# Altium PCB miaow_foc_board.PcbDoc (part 1 of 2)
Units mil, origin at the board's own origin, x right, y up, seen from the top; angles counter-clockwise.
Board outline 3070.7 x 3057.58 mil, 6 copper layers (SIG01, GND02, SIG03, PWR04, GND05, SIG06), stack 60.567 mil thick; 396 components, 384 nets, 1886 pads, 189 vias.
Unrouted connection lines stored in the file: 864.
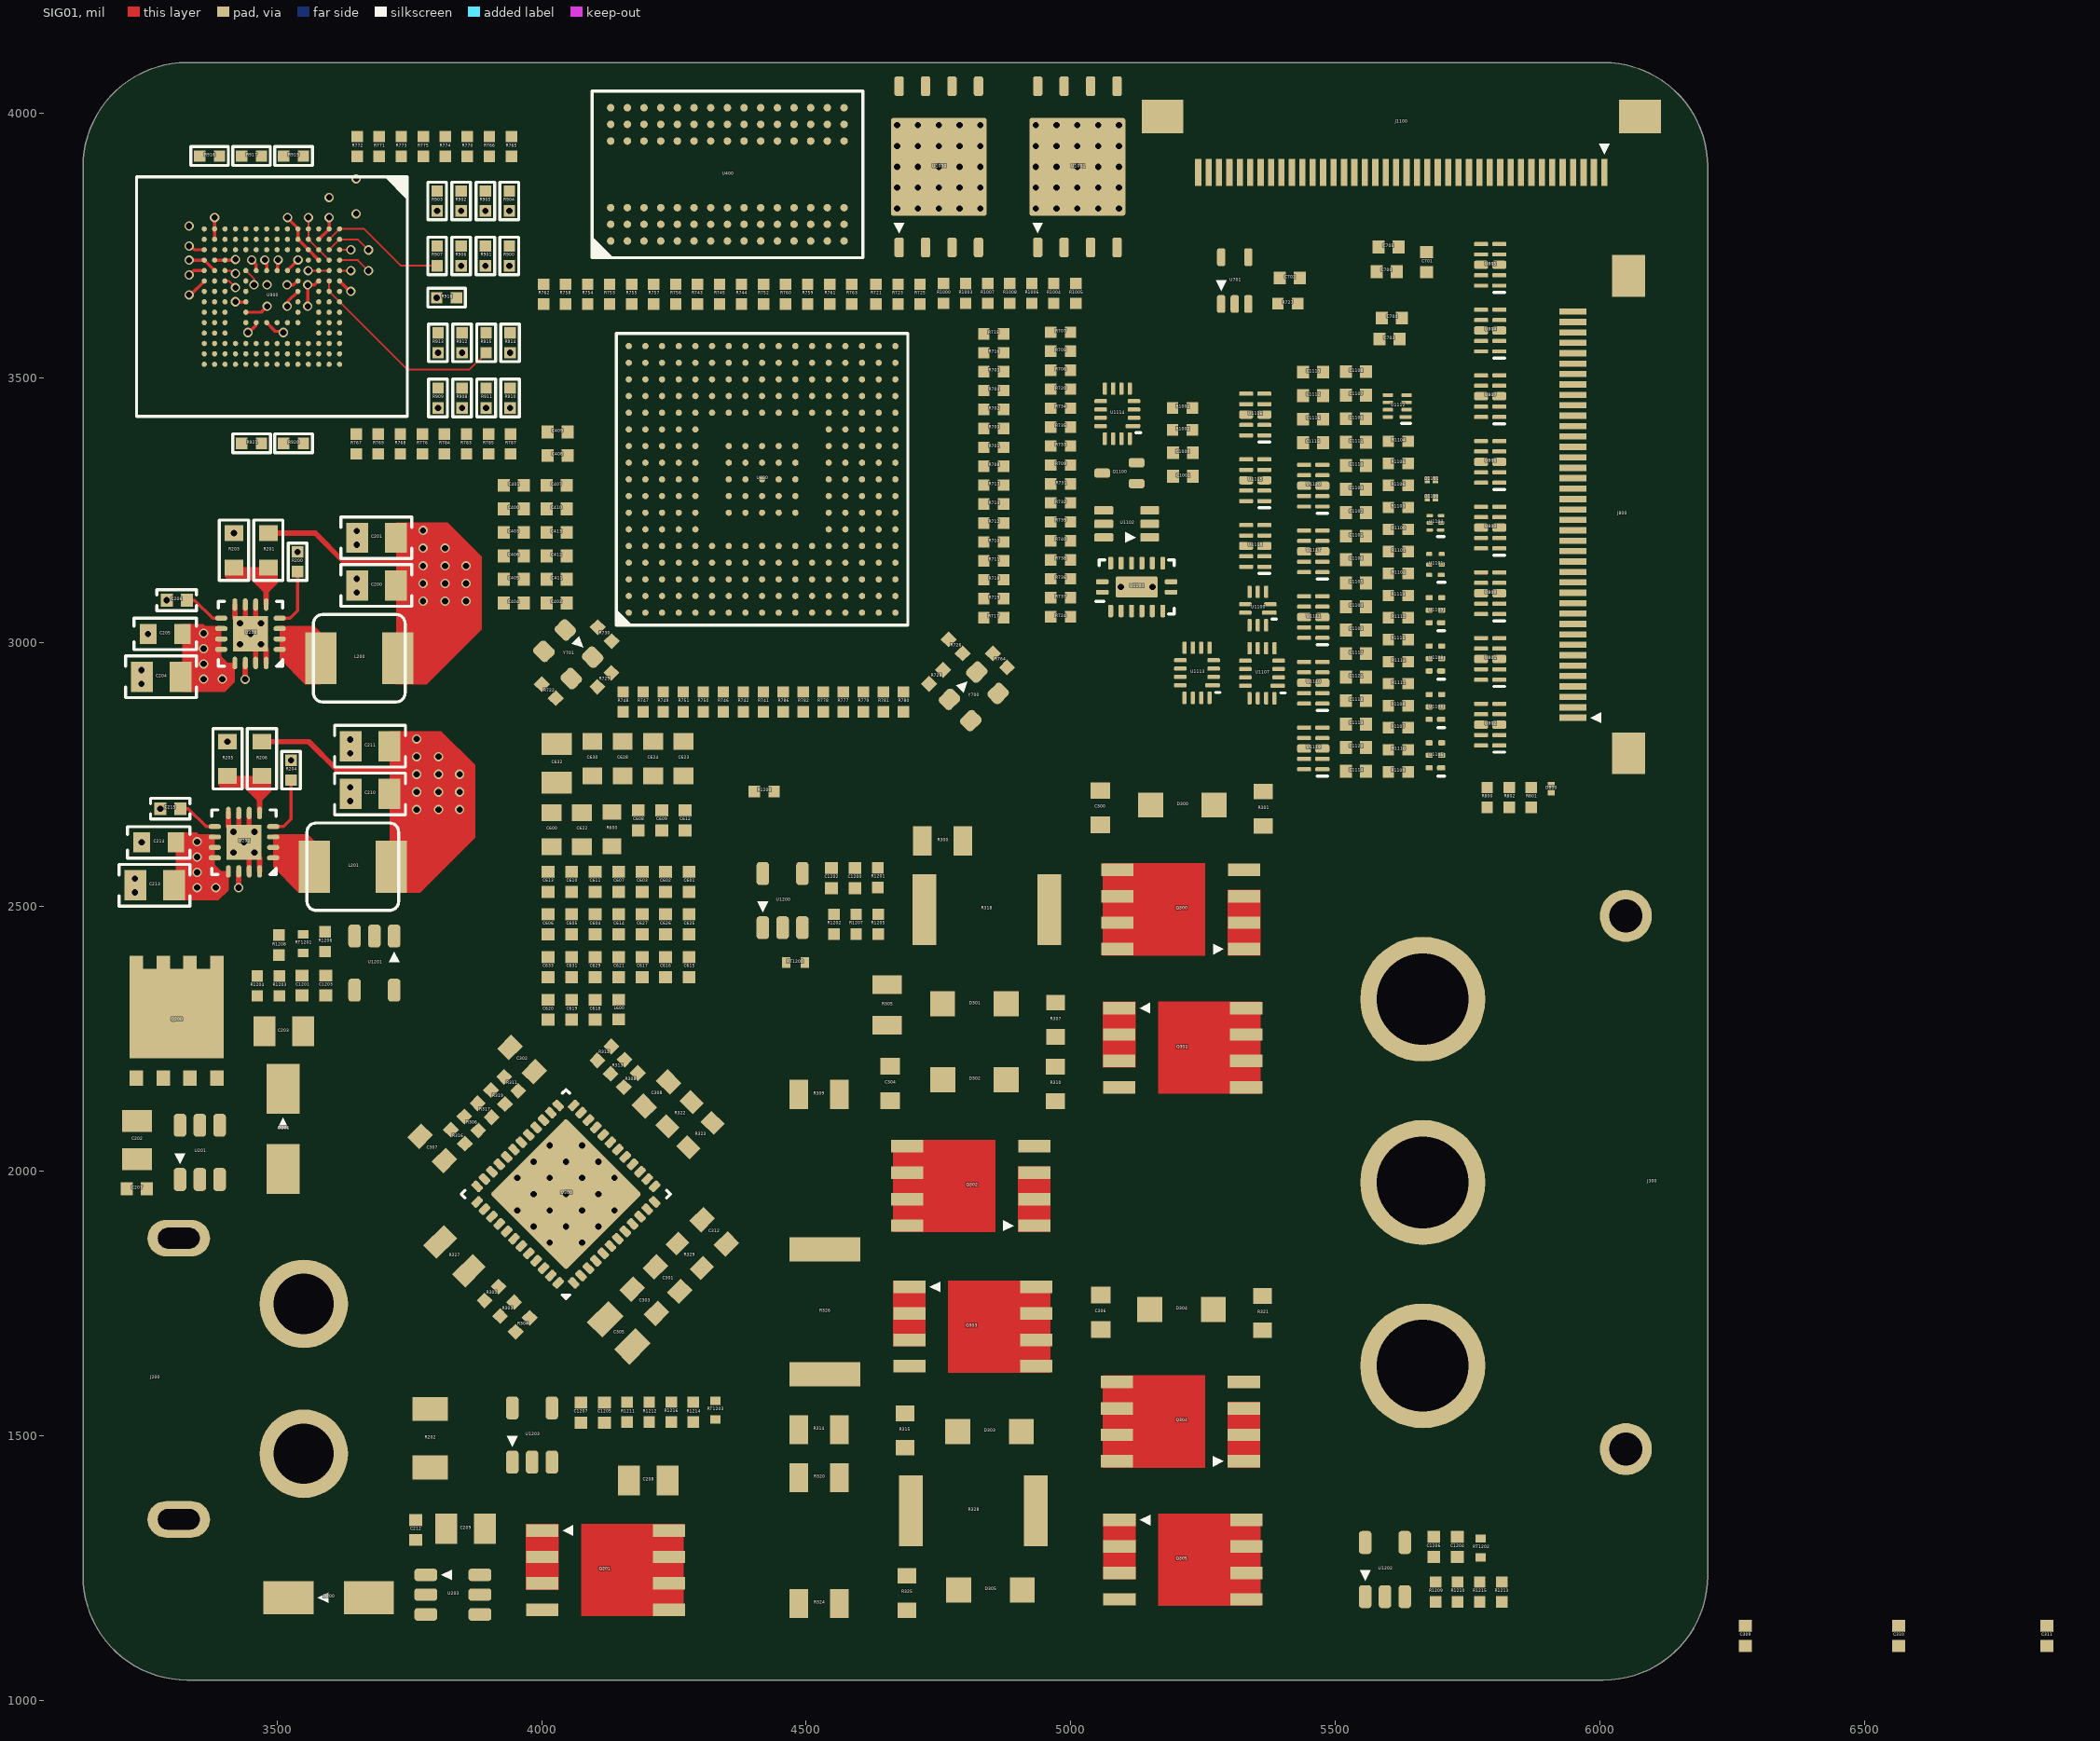
[diagram p0: SIG01 view]
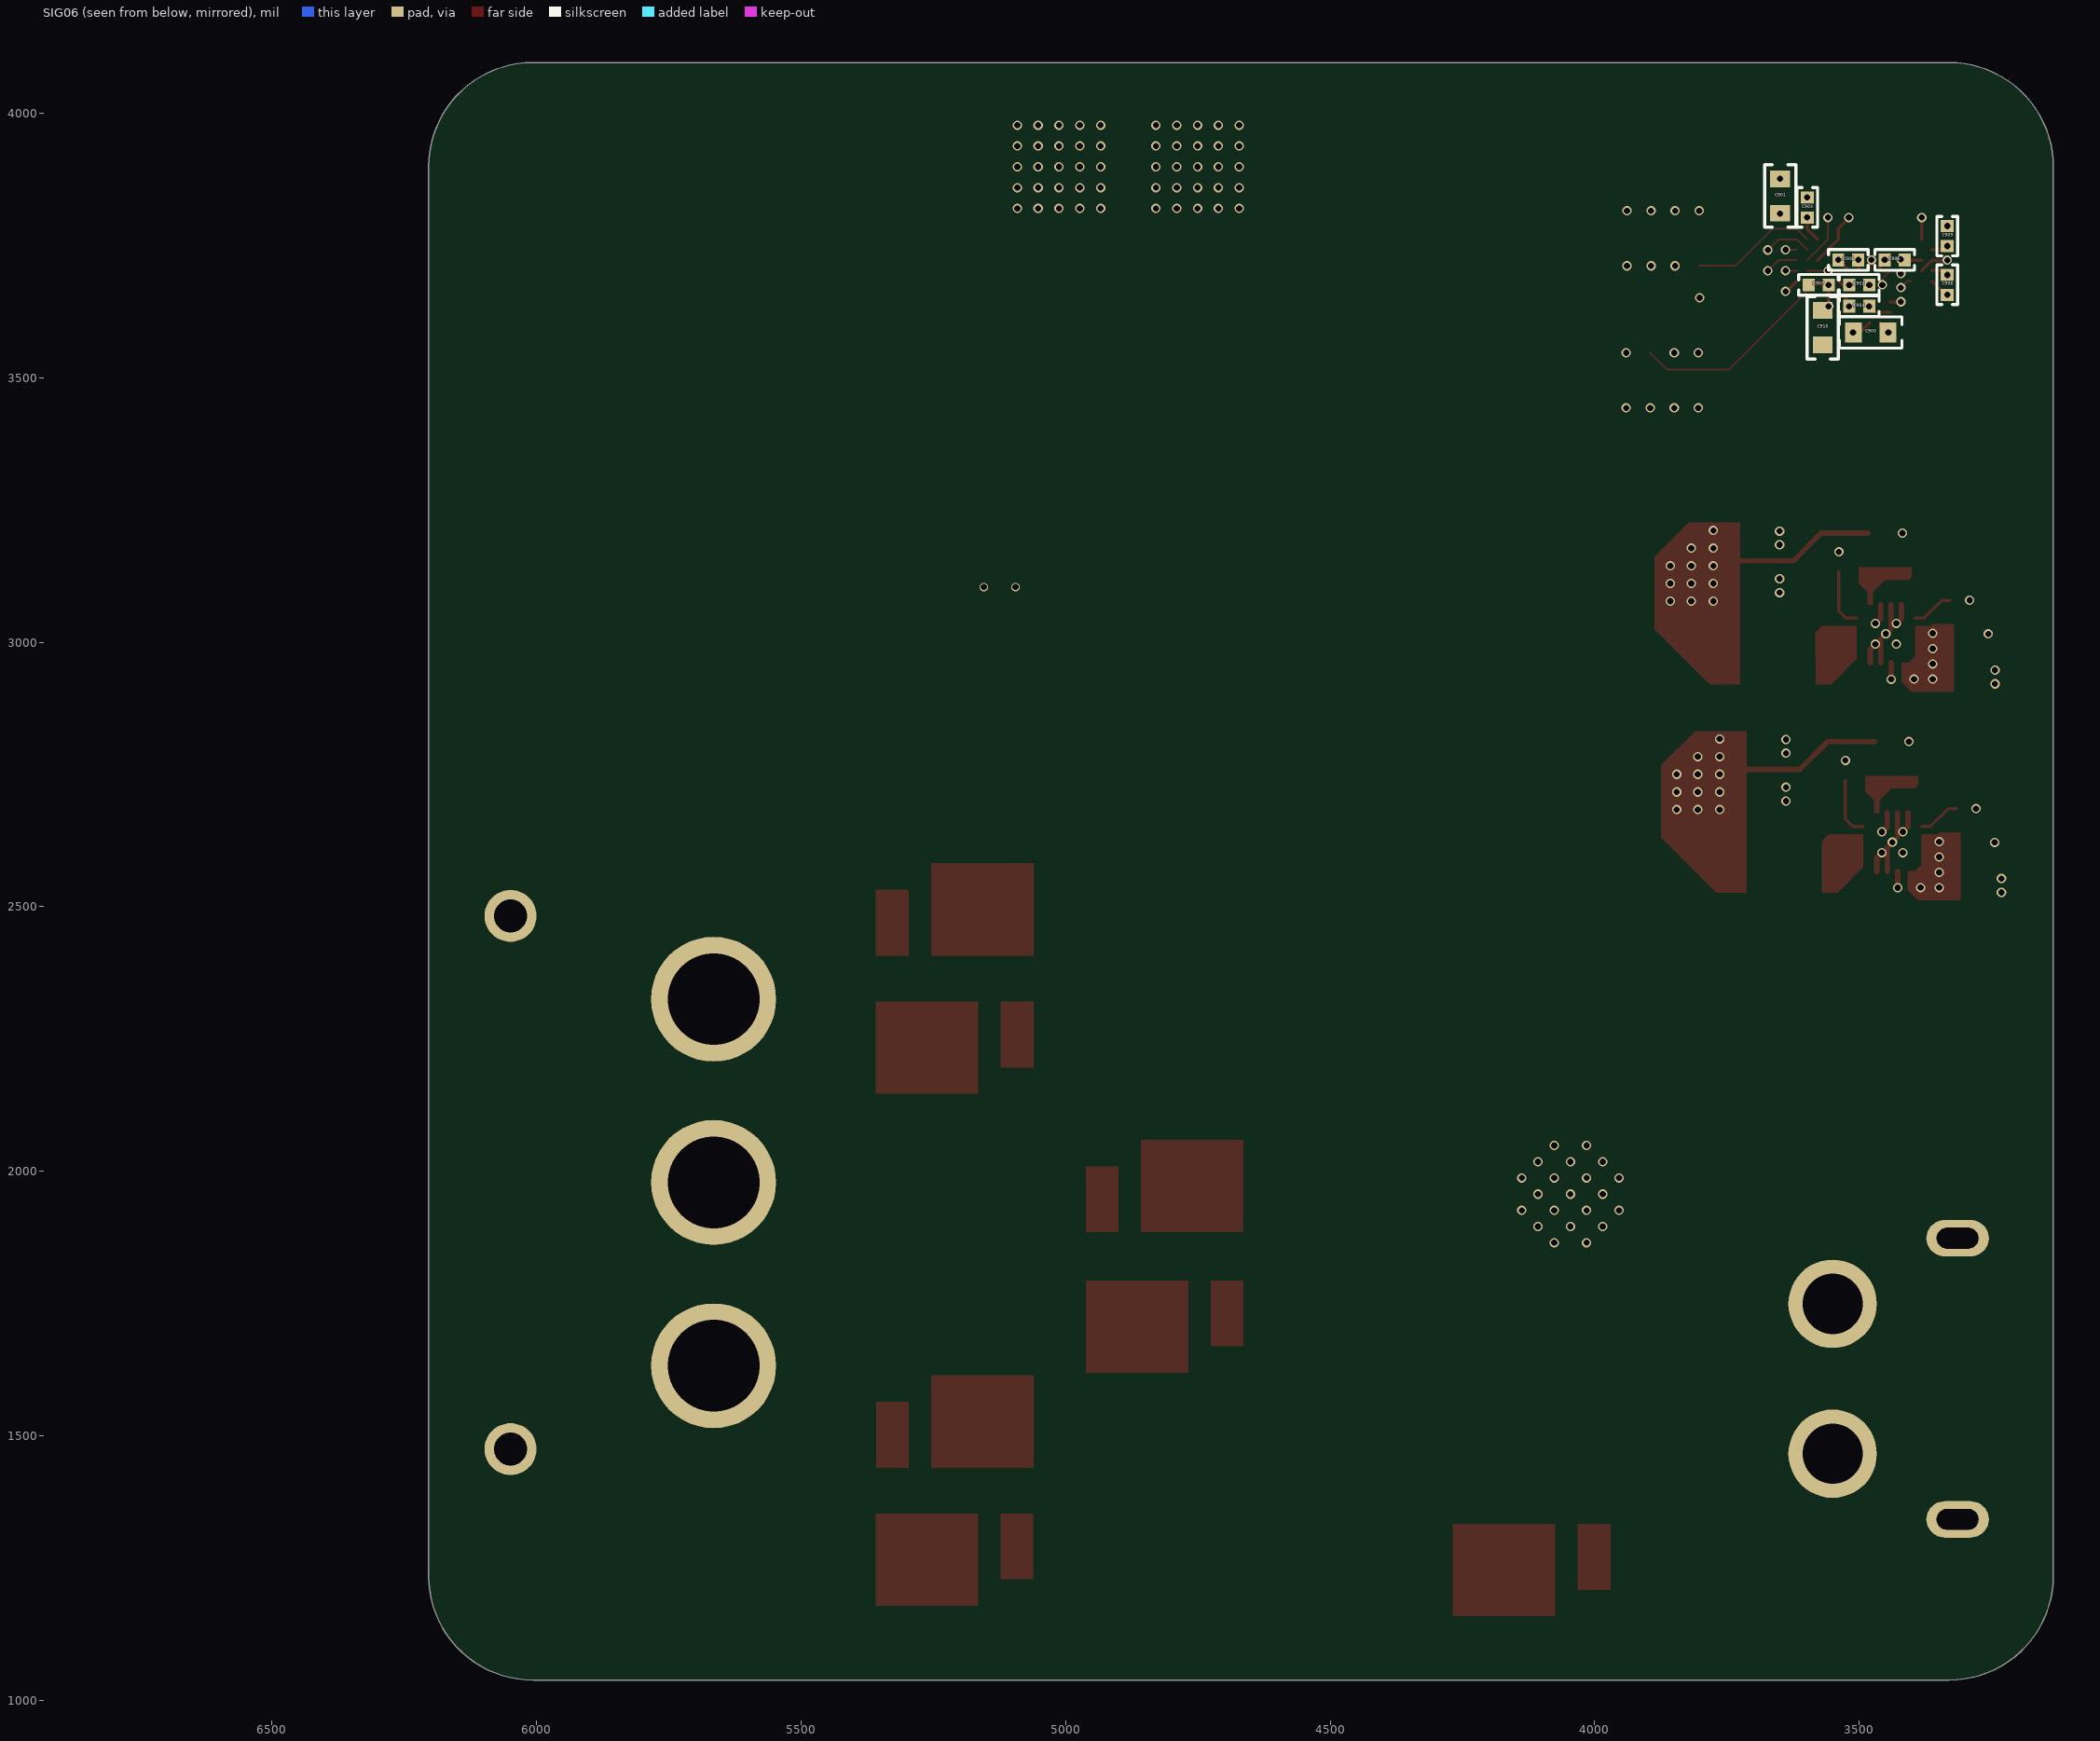
[diagram p1: SIG06 view, seen from below]
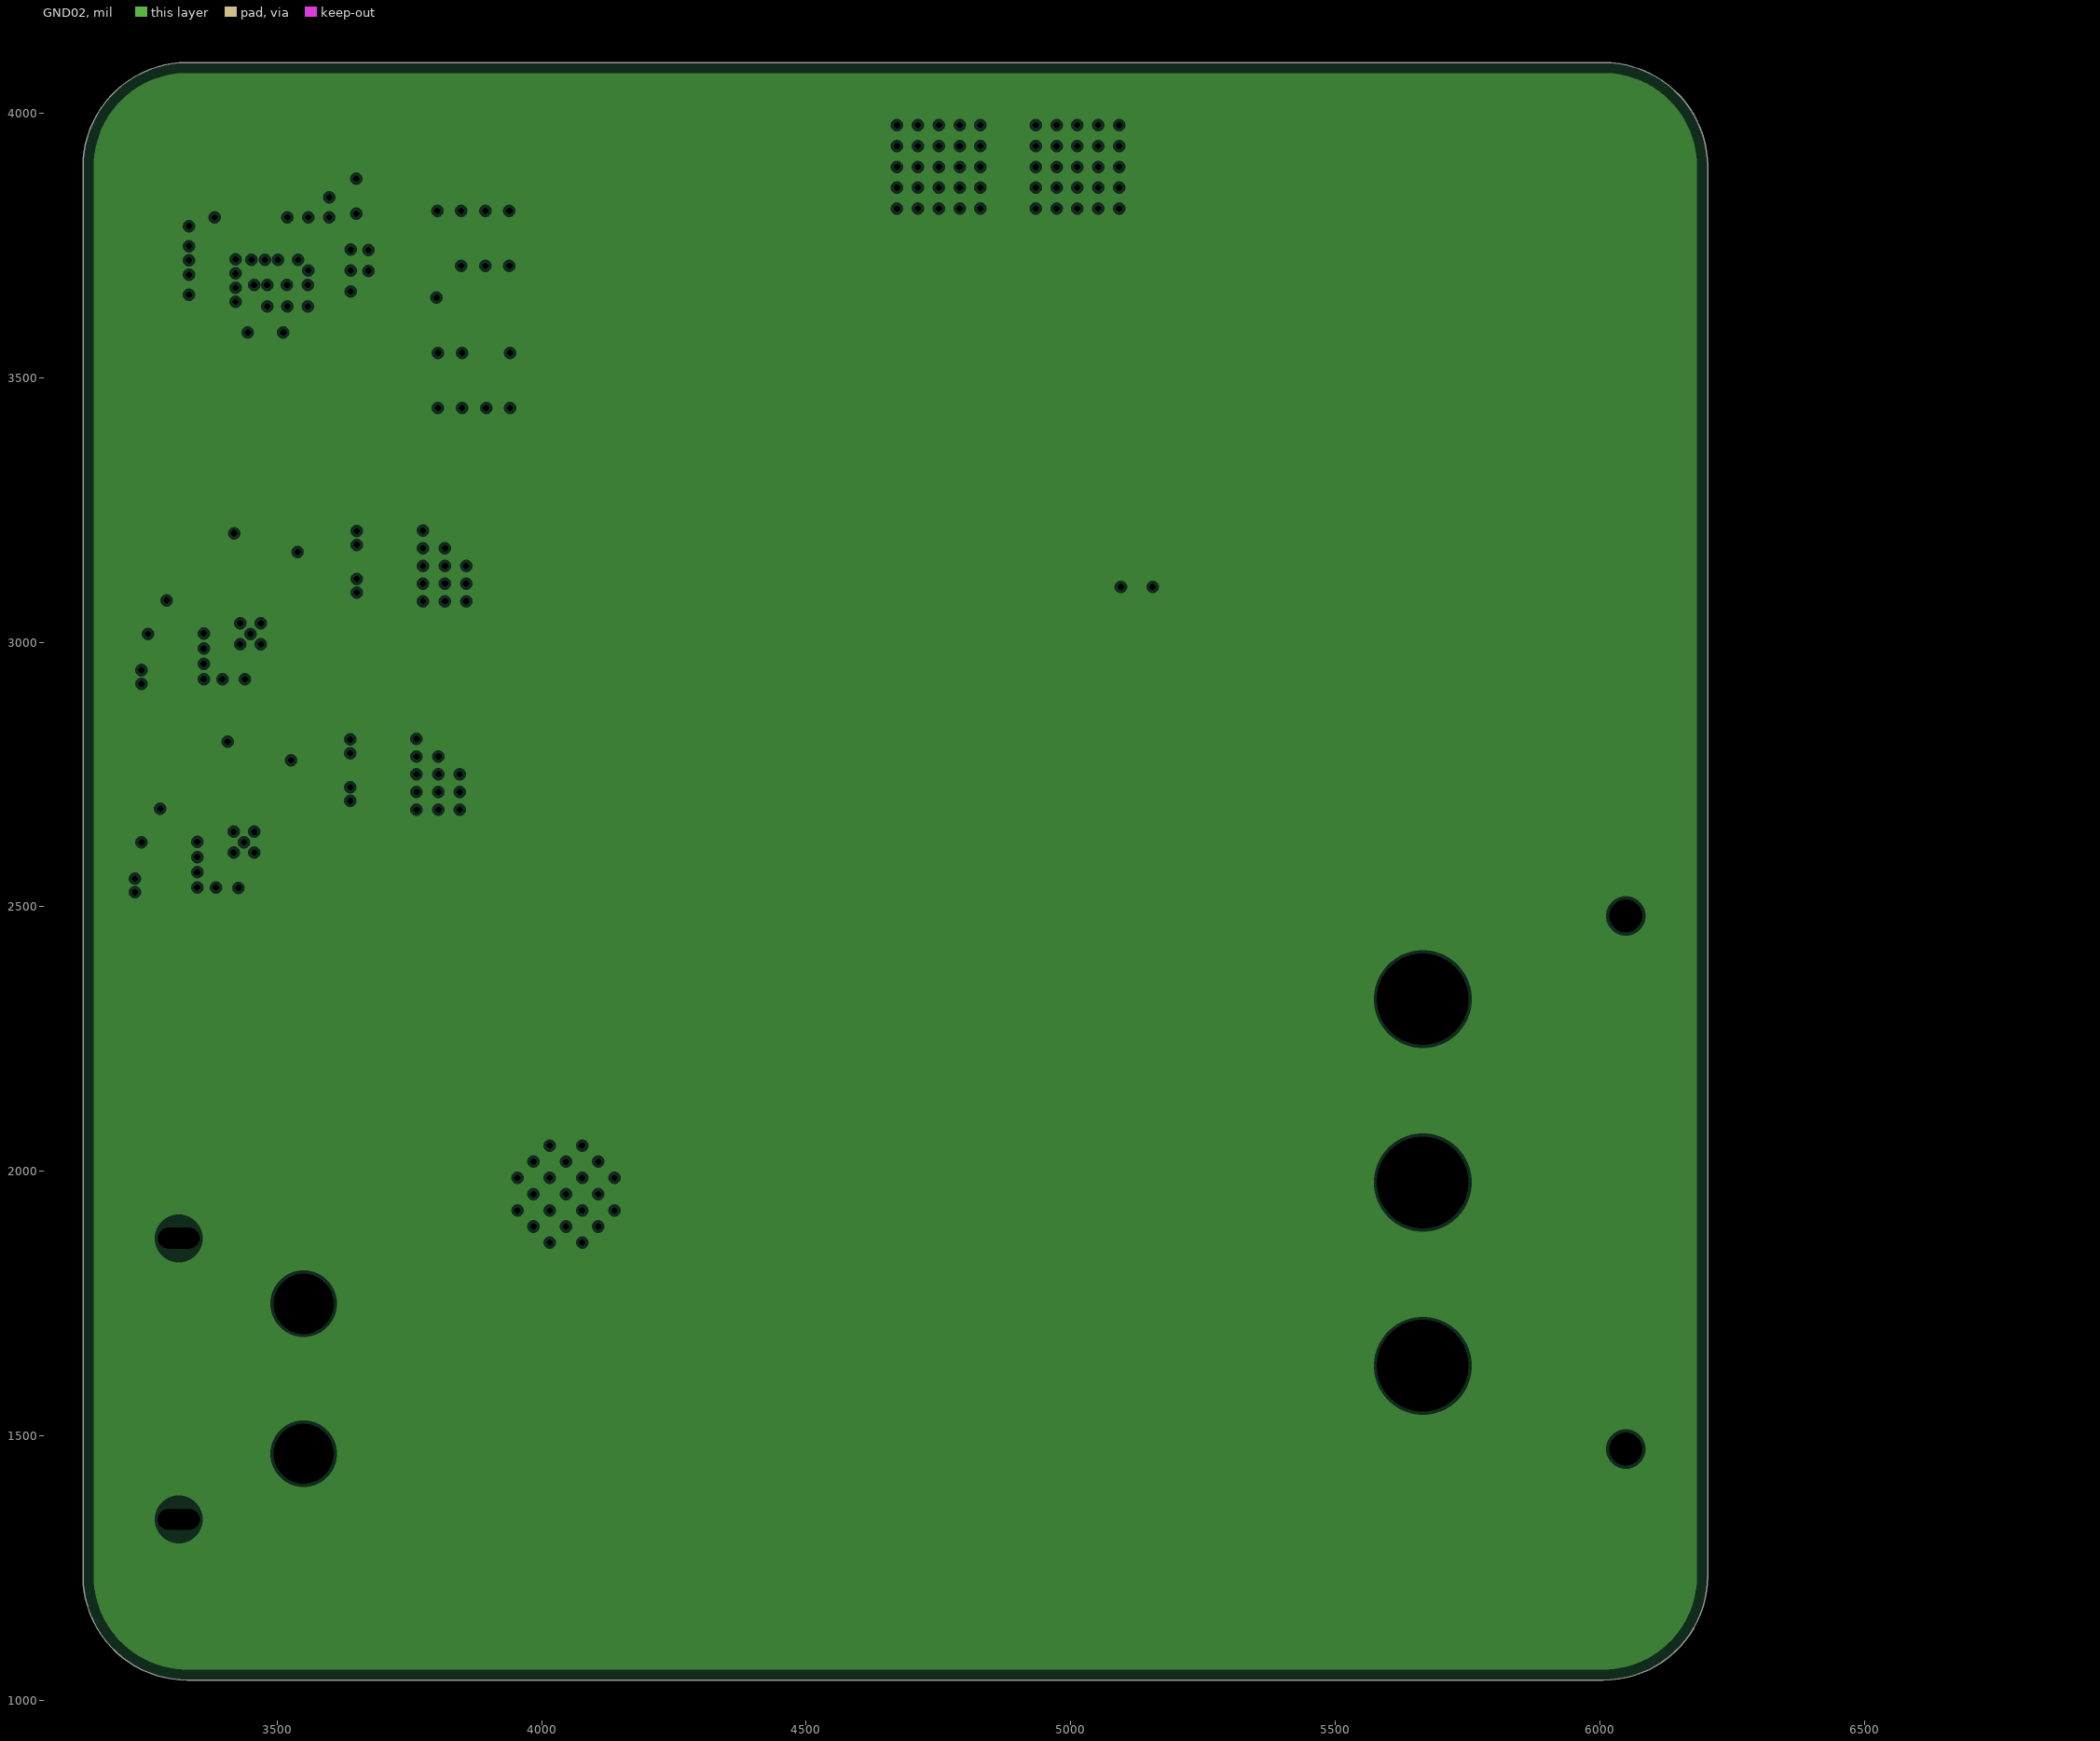
[diagram p2: GND02, clearances drawn from the general rule]
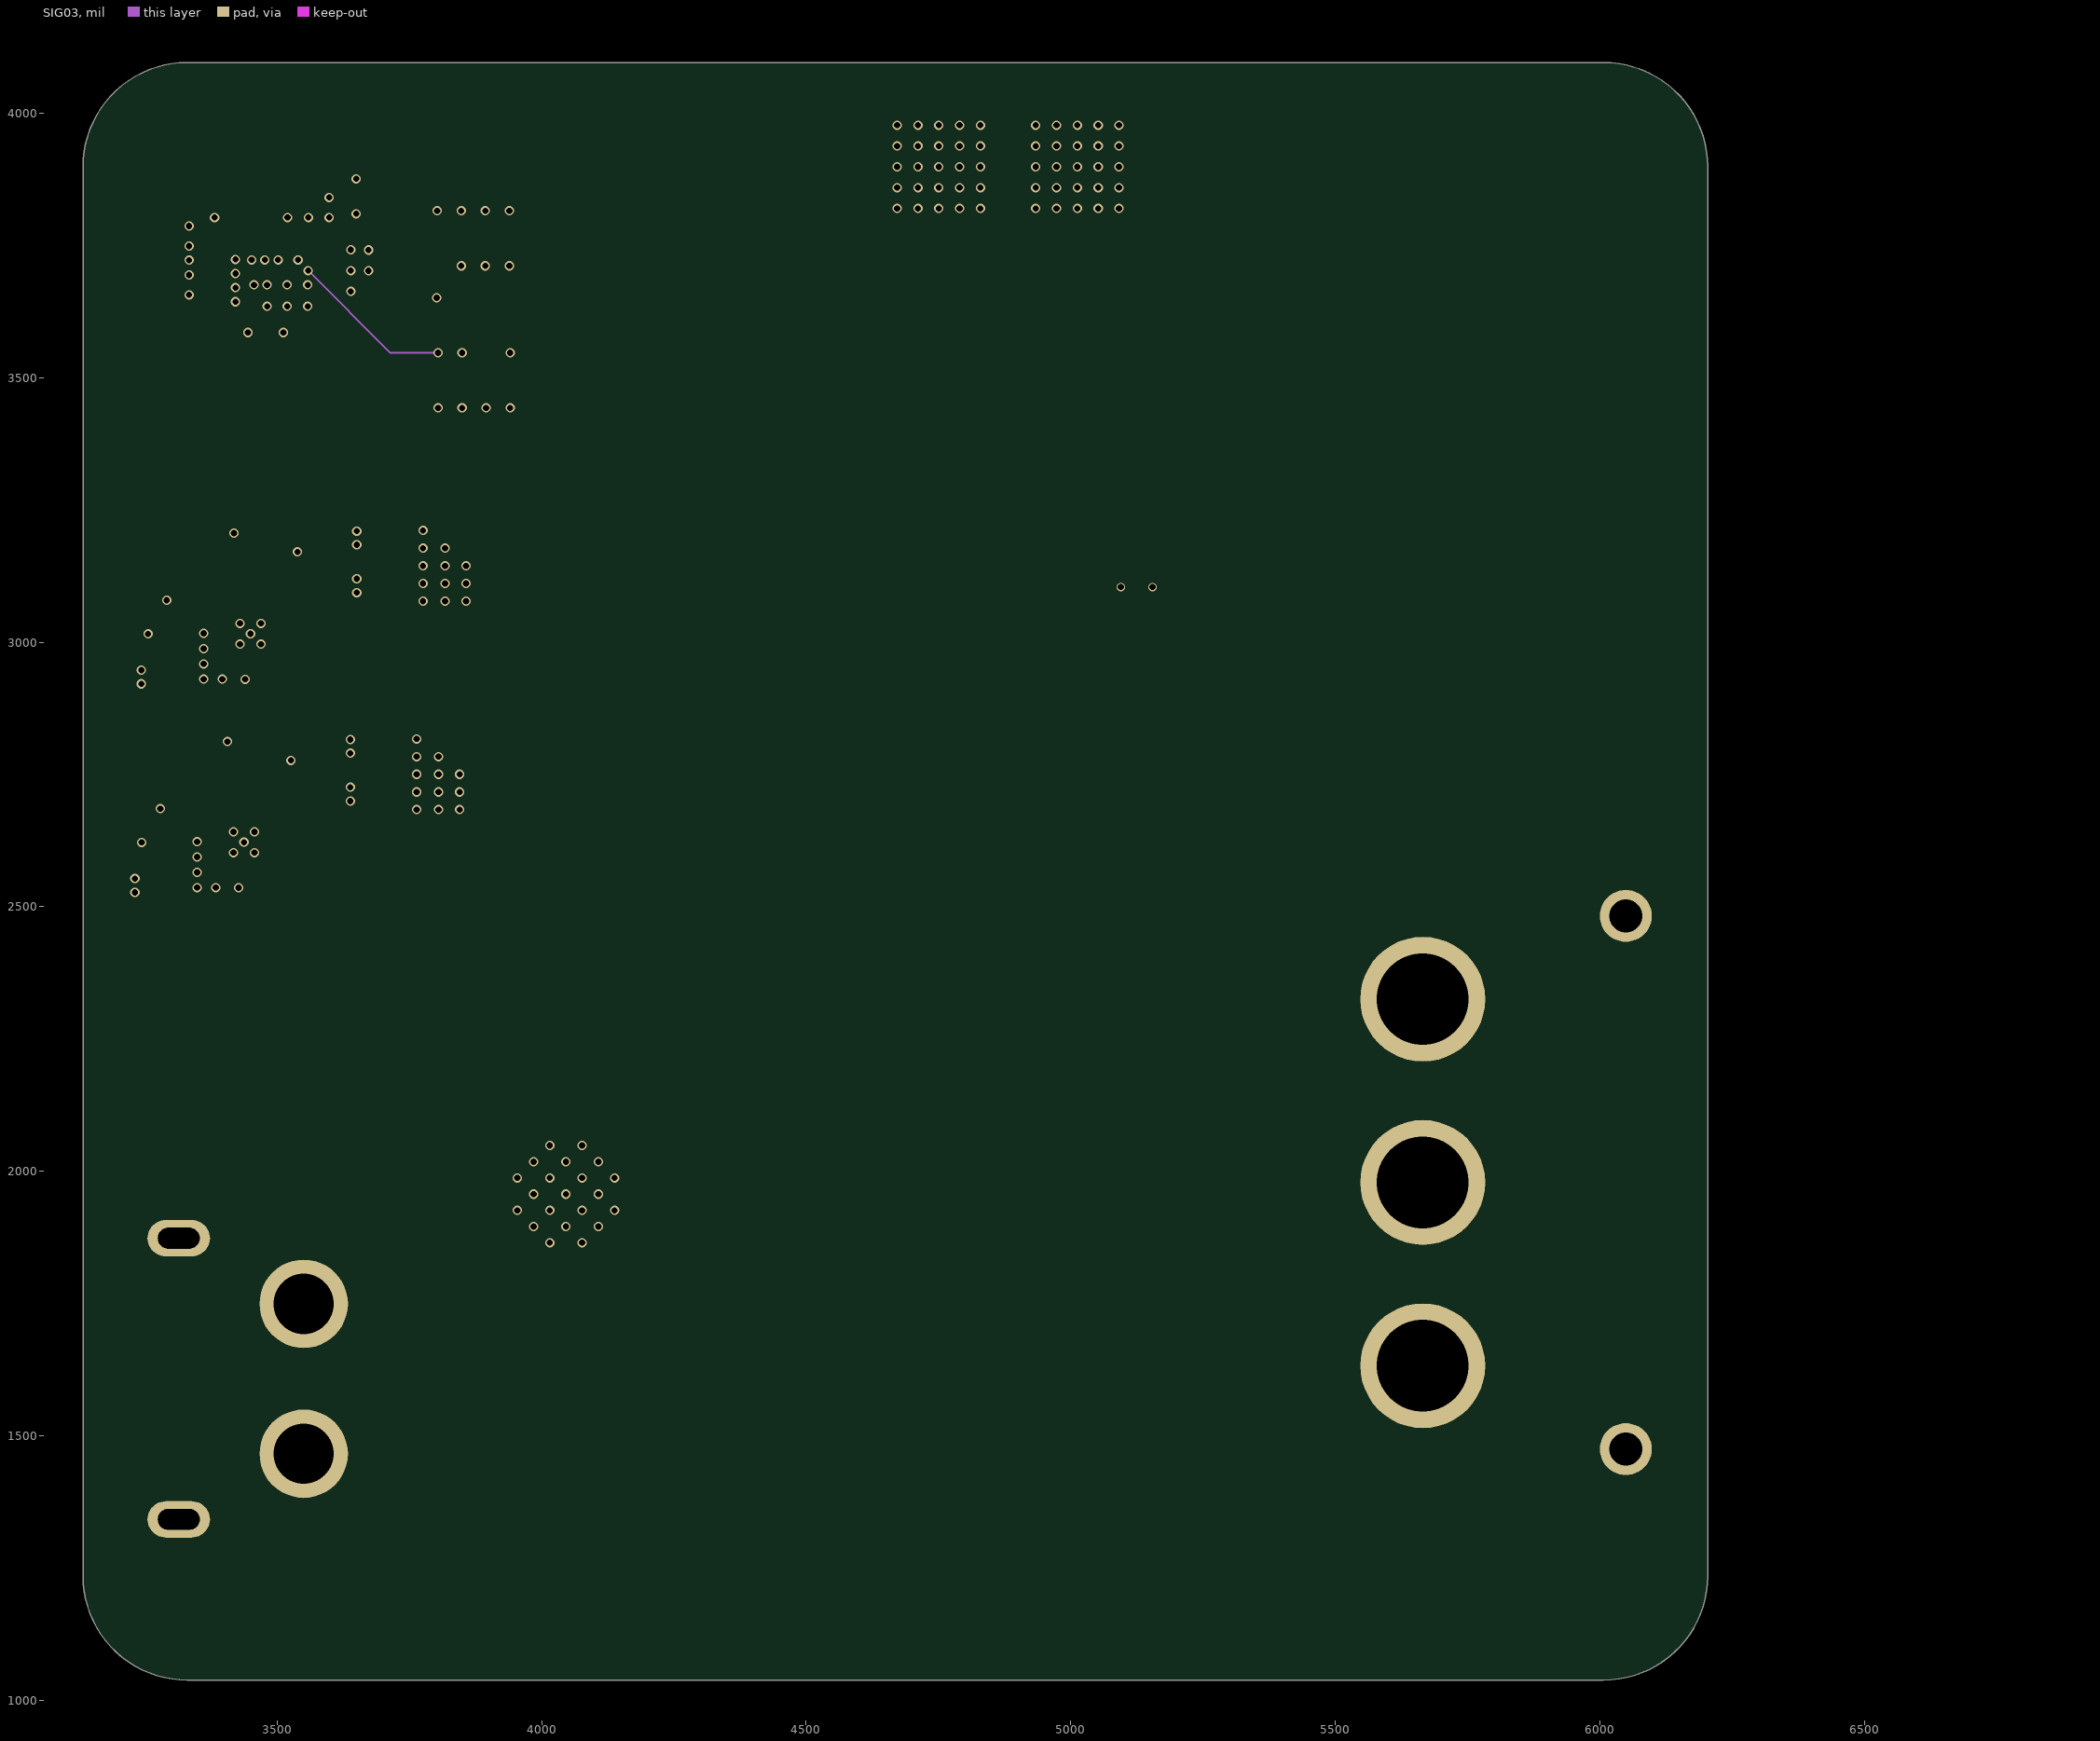
[diagram p3: SIG03]
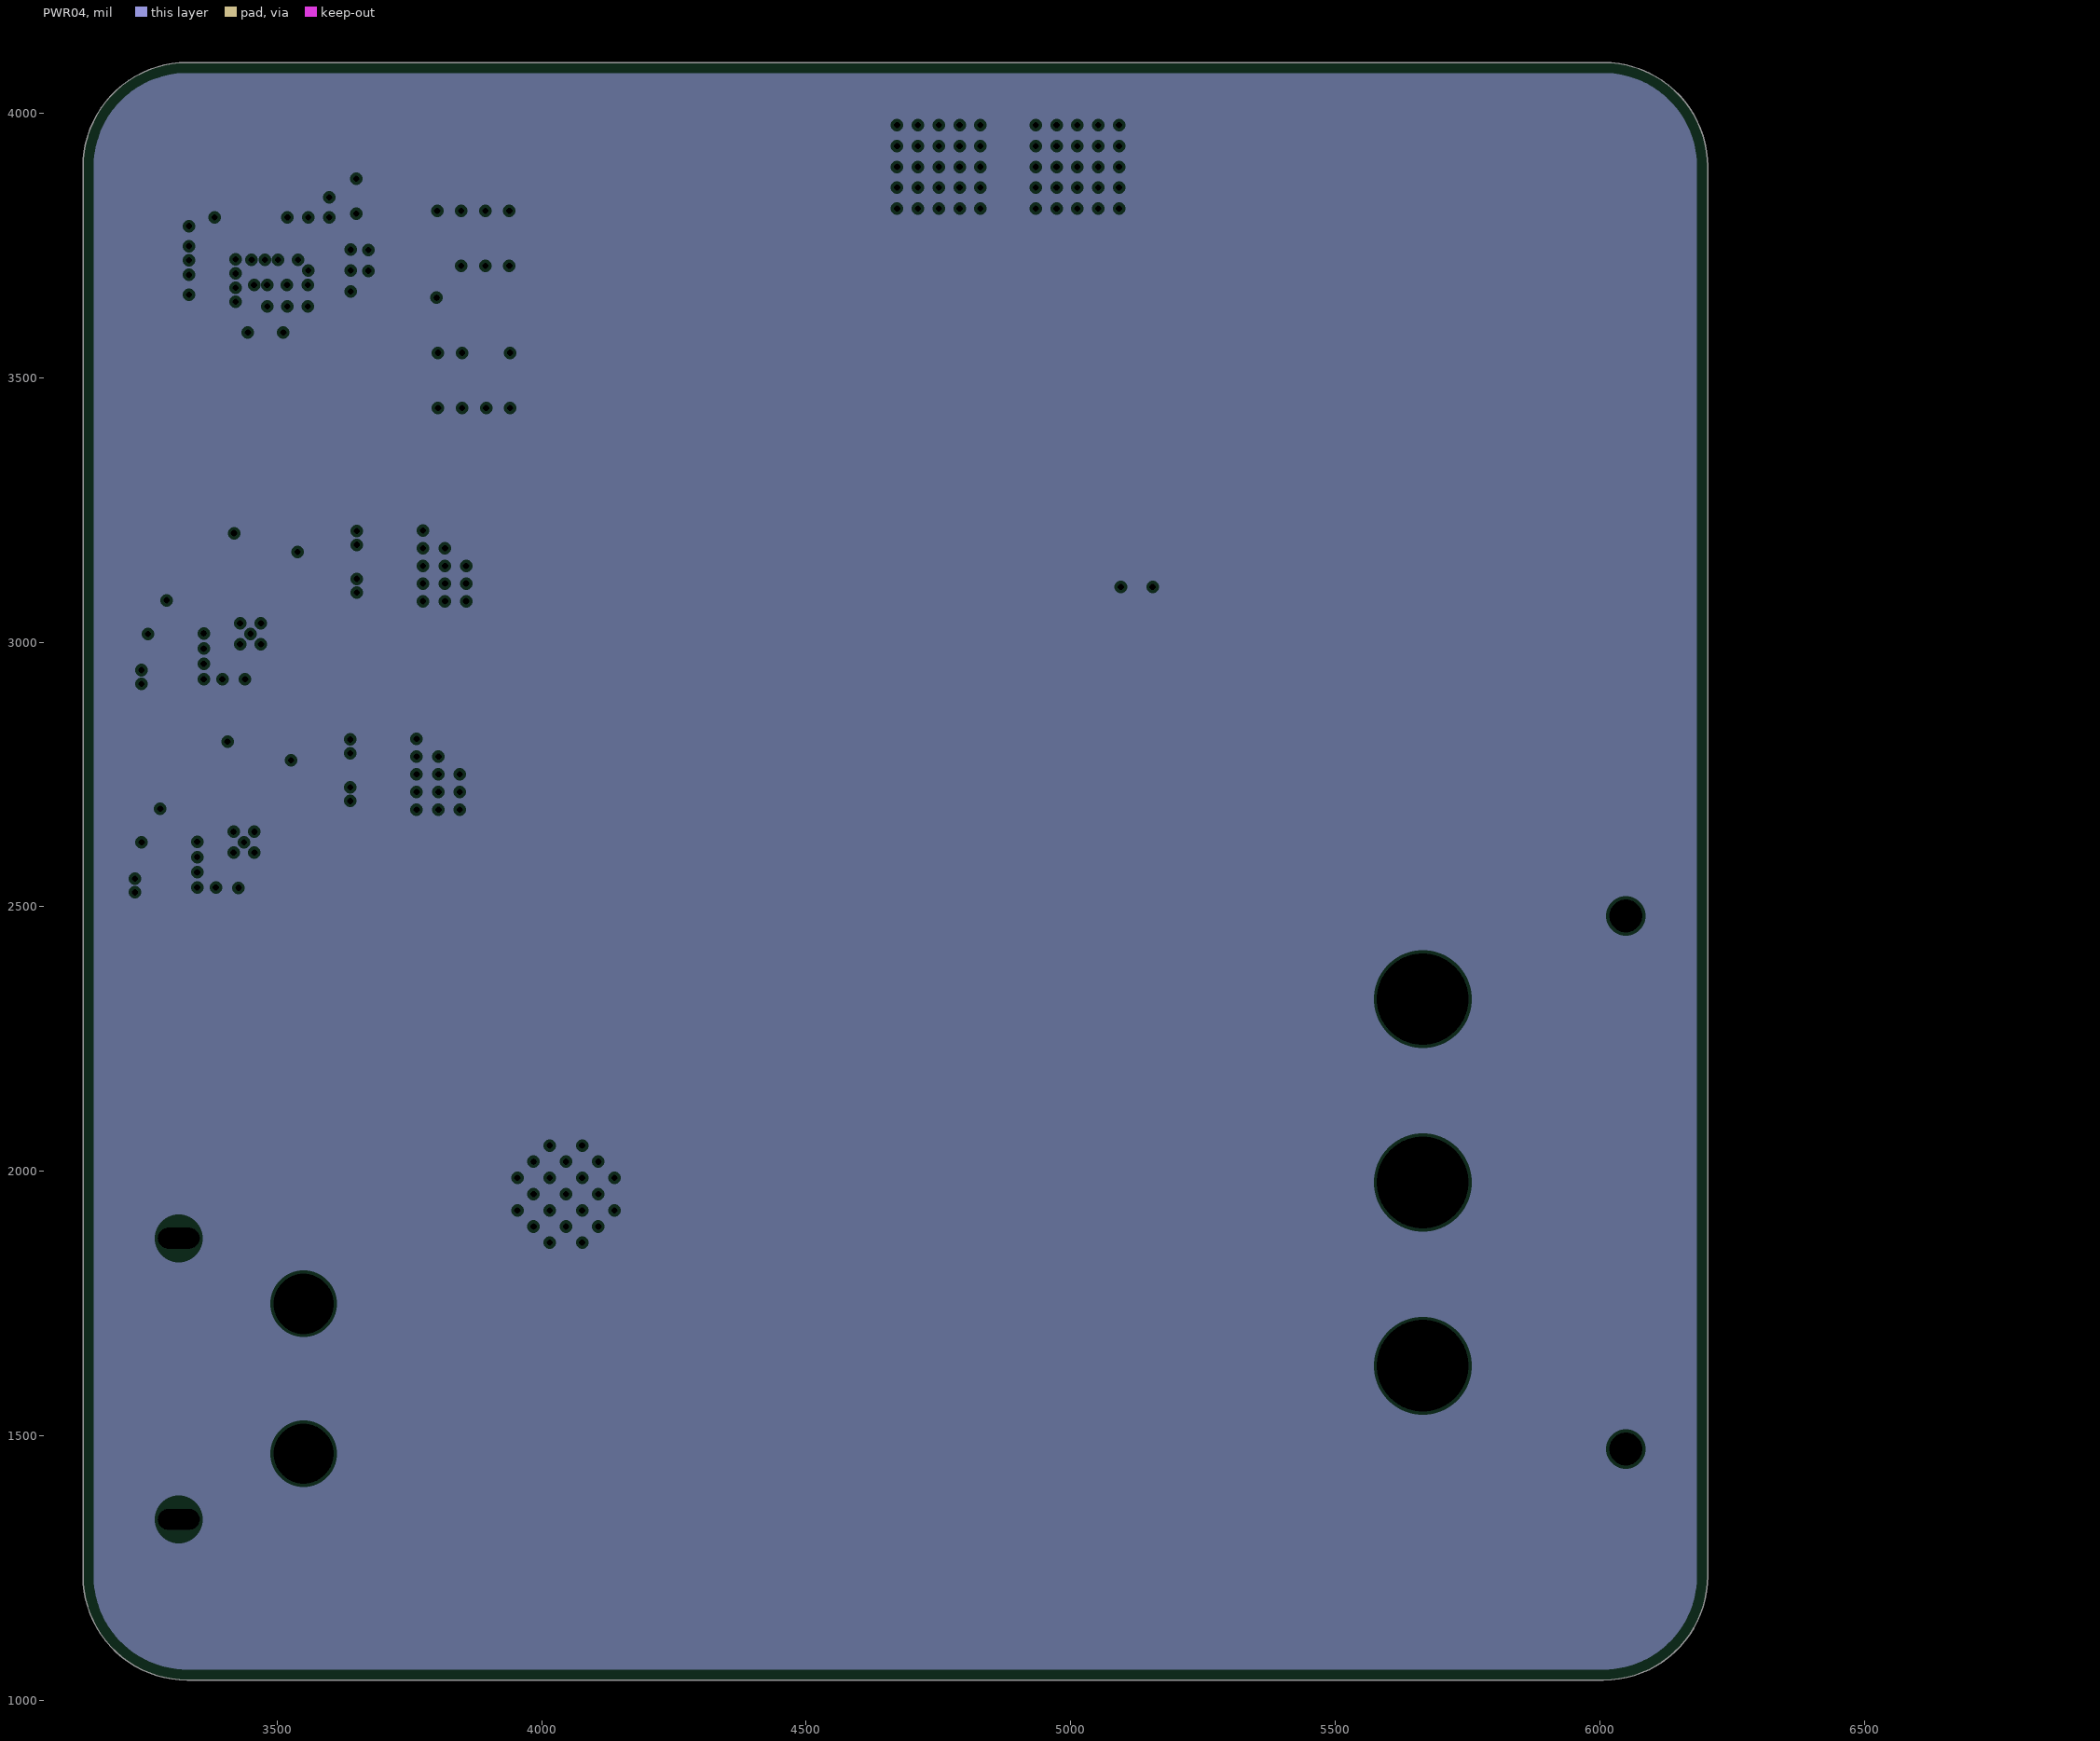
[diagram p4: PWR04, clearances drawn from the general rule]
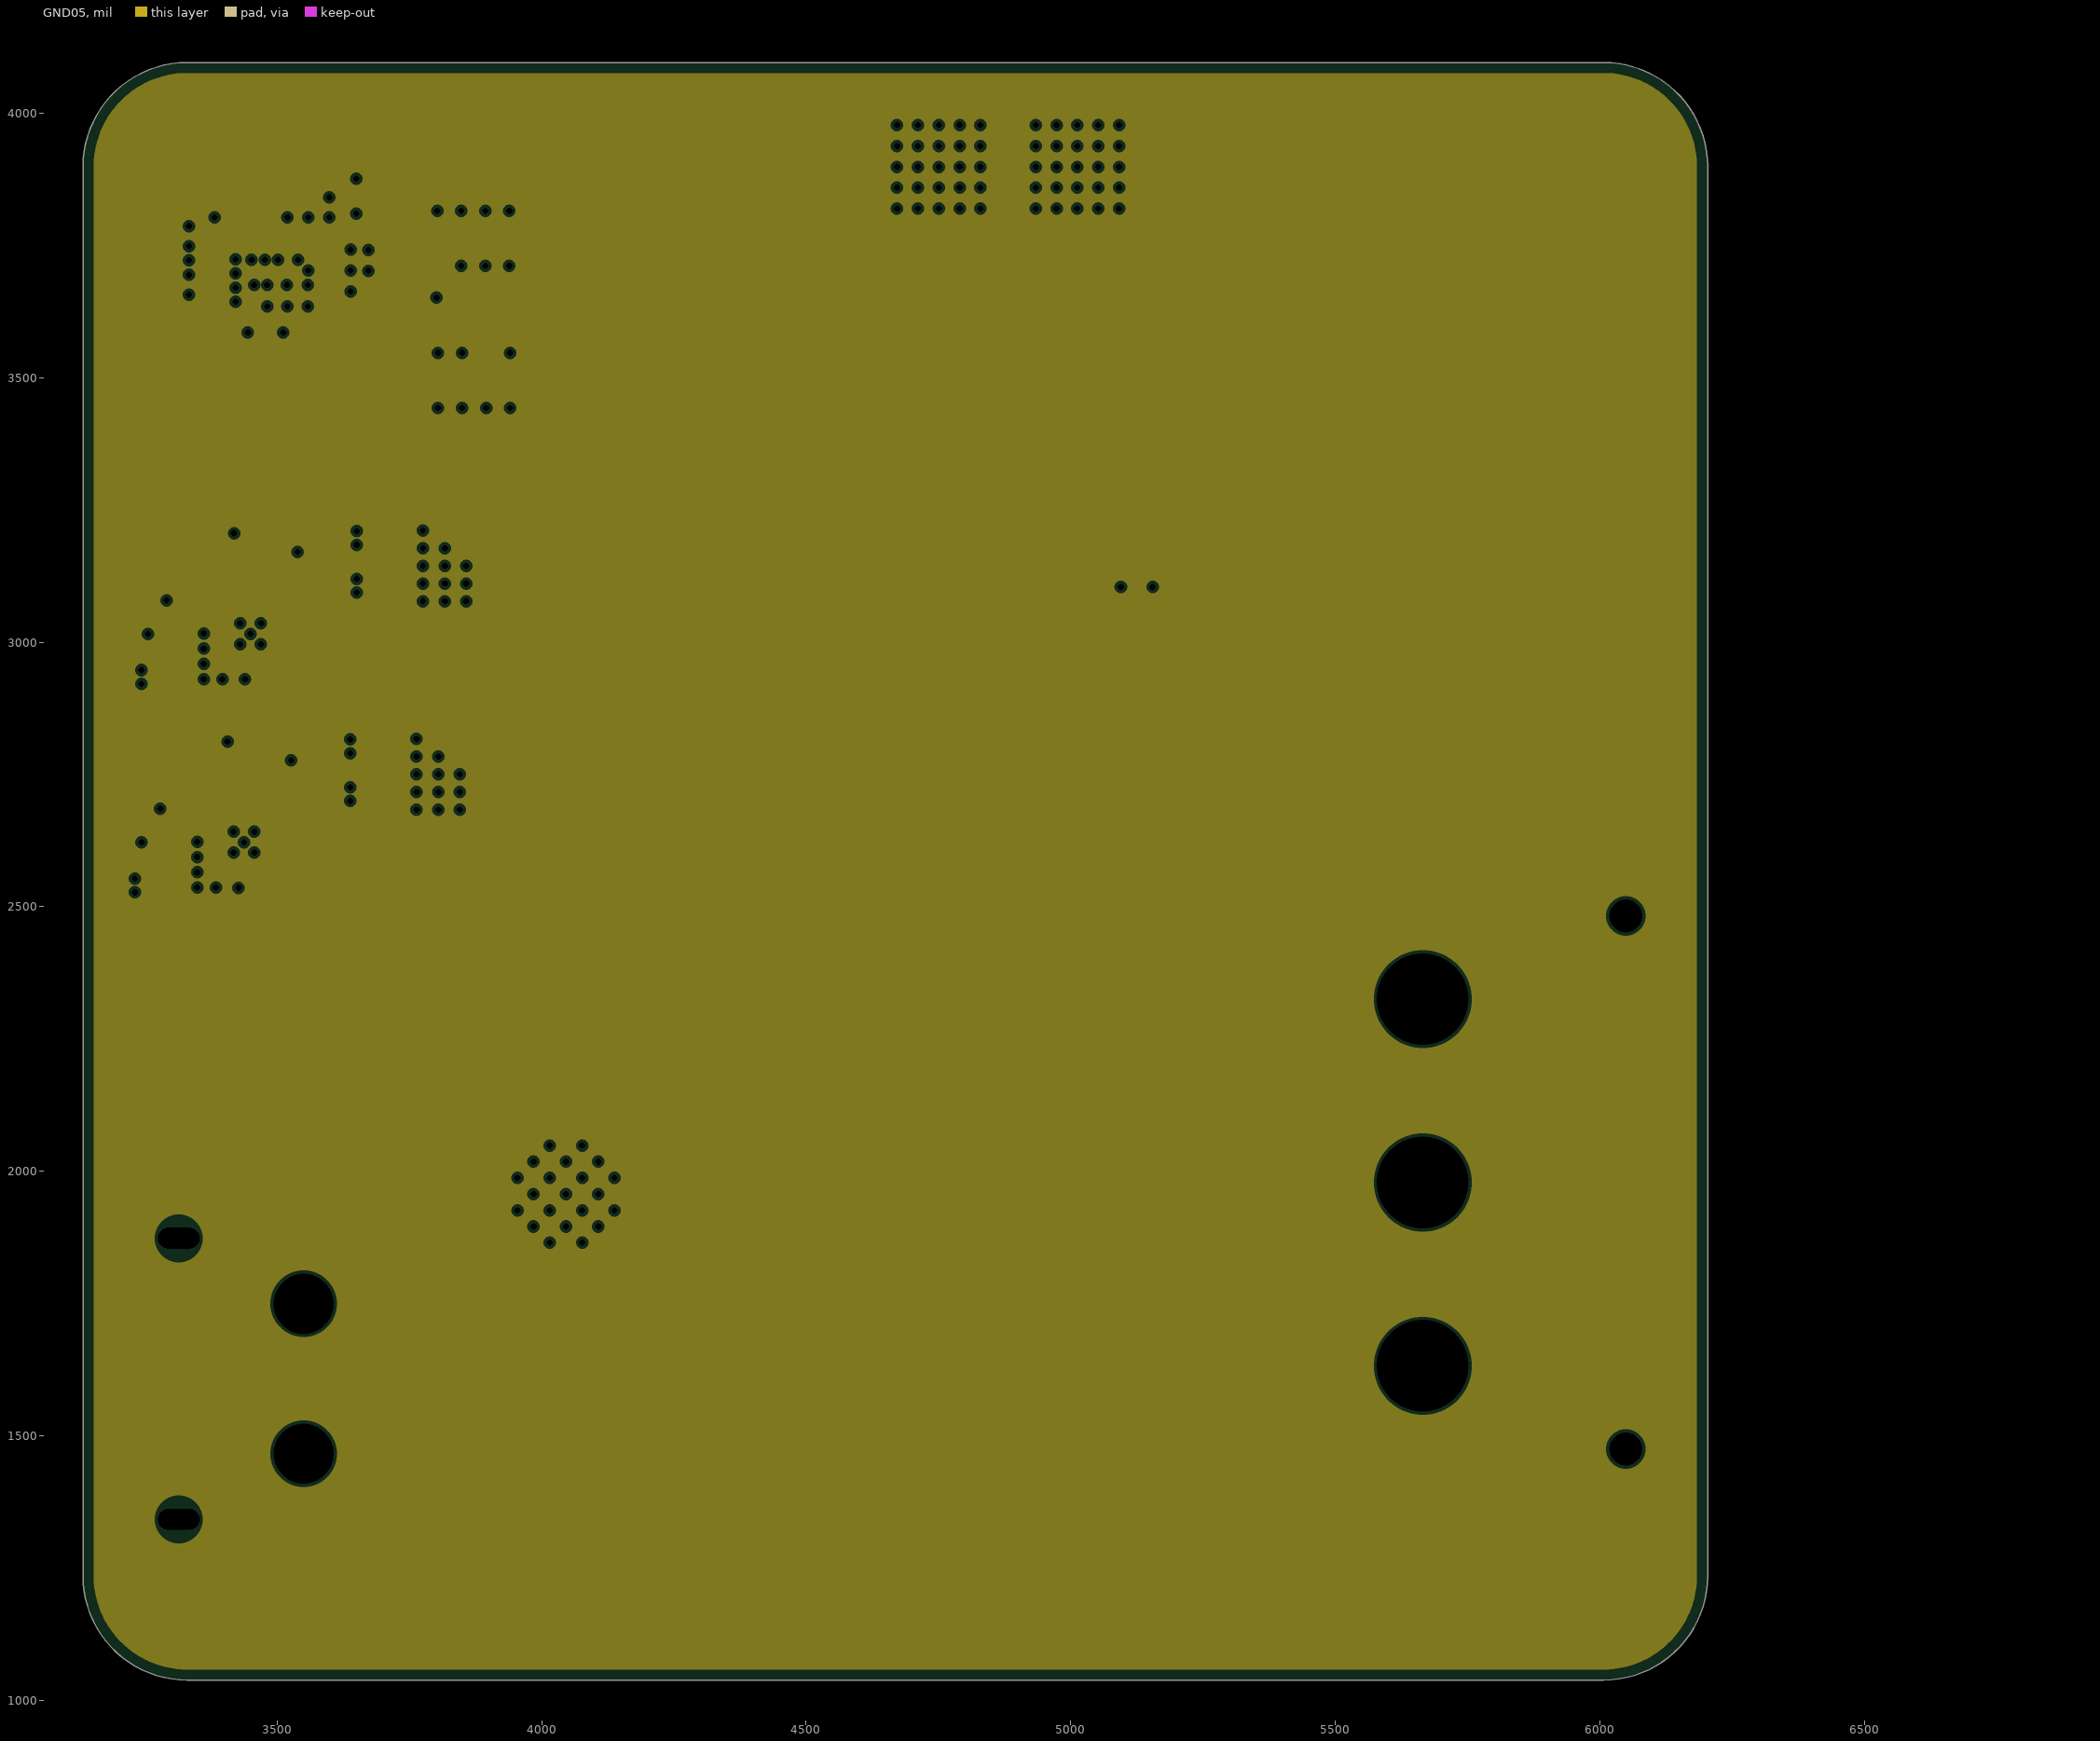
[diagram p5: GND05, clearances drawn from the general rule]

## Layer stack, top to bottom
Top Solder: solder mask 0.4, Solder Resist, Dk 3.5
SIG01: signal copper 1.378
Dielectric 2: prepreg 3.9134, PP-015, Dk 4.3
GND02: plane copper 0.5984
Dielectric 4: core 21.6535, Core-037, Dk 4.8
SIG03: signal copper 0.5984
Dielectric 1: prepreg 4.2835, PP-016, Dk 4.4
PWR04: plane copper 0.5984
Dielectric 5: core 21.6535, Core-037, Dk 4.8
GND05: plane copper 0.5984
Dielectric 3: prepreg 3.9134, PP-015, Dk 4.3
SIG06: signal copper 1.378
Bottom Solder: solder mask 0.4, Solder Resist, Dk 3.5

## Board outline
3133.15,1235.11 3133.15,3898.99 cw(c3330,3898.99) 3330,4095.84 6007,4095.84 cw(c6007,3898.99) 6203.85,3898.99 6203.85,1235.11 cw(c6007,1235.11) 6007,1038.26 3330,1038.26 cw(c3330,1235.11)

## Design rules (kind name [scope] priority, off if disabled: settings)
BoardOutlineClearance [All] p1: gap=7.87 ignorepadtopadclearanceinfootprint=FALSE
Clearance Clearance_BGA [WithinRoom('BGA') vs WithinRoom('BGA')] p1: gap=3 ignorepadtopadclearanceinfootprint=FALSE except(3.54: Arc-SMDPad Arc-Via Track-SMDPad Track-Via SMDPad-SMDPad SMDPad-THPad SMDPad-Via SMDPad-Fill SMDPad-Poly SMDPad-Region SMDPad-Text SMDPad-Hole THPad-Via Via-Via Via-Fill Via-Poly Via-Region Via-Text Via-Hole)
Clearance [All] p2: gap=3.5 ignorepadtopadclearanceinfootprint=FALSE except(3.94: Arc-SMDPad Arc-Via Track-SMDPad Track-Via SMDPad-SMDPad SMDPad-THPad SMDPad-Via SMDPad-Fill SMDPad-Poly SMDPad-Region SMDPad-Text SMDPad-Hole THPad-Via Via-Via Via-Fill Via-Poly Via-Region Via-Text Via-Hole)
FanoutControl Fanout_BGA [IsBGA or HasFootprint('IS42S32800J-6BLI')] p1: bgadir=Out bgaviamode=Centered fanoutstyle=BGA fanoutdirection=Alternating viagrid=1 // Fanout_BGA (Default Rule)
FanoutControl Fanout_LCC [IsLCC] p2: bgadir=Out bgaviamode=Centered fanoutstyle=UnderPads fanoutdirection=Alternating viagrid=1 // Fanout_LCC (Default Rule)
FanoutControl Fanout_SOIC [IsSOIC] p3: bgadir=Out bgaviamode=Centered fanoutstyle=UnderPads fanoutdirection=Alternating viagrid=1 // Fanout_SOIC (Default Rule)
FanoutControl Fanout_Small [(CompPinCount < 5)] p4: bgadir=Out bgaviamode=Centered fanoutstyle=UnderPads fanoutdirection=OutThenIn viagrid=1 // Fanout_Small (Default Rule)
FanoutControl Fanout_Default [All] p5: bgadir=Out bgaviamode=Centered fanoutstyle=UnderPads fanoutdirection=Alternating viagrid=1 // Fanout_Default (Default Rule)
HoleSize [All] p1: absolutevalues=TRUE maxlimit=196.85 minlimit=11.81 maxpercent=80.000 minpercent=20.000
PlaneClearance [All] p1: clearance=6
PlaneConnect [All] p1: planeconnectstyle=Relief reliefexpansion=20 reliefentries=4 reliefconductorwidth=10 reliefairgap=10
PolygonConnect [All] p1: connectstyle=Relief reliefconductorwidth=10 reliefentries=4 polygonreliefangle="90 Angle" airgapwidth=10
RoomDefinition BGA [False vs False] p1: confinementstyle=ConfineIn formatcopy=TRUE lockcomponents=FALSE outline 3166.65,4510.94 5143.22,4510.94 5143.22,3032.84 3166.65,3032.84
RoutingVias RoutingVias_1 [WithinRoom('BGA')] p1: holewidth=11.81 width=15.75 viastyle="Through Hole" minholewidth=11.81 minwidth=15.75 maxholewidth=11.81 maxwidth=17.72
RoutingVias [All] p2: holewidth=11.81 width=17.72 viastyle="Through Hole" minholewidth=11.81 minwidth=17.72 maxholewidth=11.81 maxwidth=17.72
SilkToSilkClearance [All] p1 off: silktosilkclearance=10
SilkToSolderMaskClearance [IsPad] p1 off: minsilkscreentomaskgap=10 clearancetoexposedcopper=TRUE
SolderMaskExpansion [All] p1: expansion=0 istentingtop=FALSE
SupplyNets "Schematic Supply Nets_4" [InNet('VBAT')] p1: voltage=0.000
SupplyNets "Schematic Supply Nets_11" [InNet('GNTC')] p2: voltage=0.000
SupplyNets "Schematic Supply Nets_10" [InNet('+3.3V')] p3: voltage=0.000
SupplyNets "Schematic Supply Nets_5" [InNet('GMCUA')] p4: voltage=0.000
SupplyNets "Schematic Supply Nets_1" [InNet('VMCUA')] p5: voltage=0.000
SupplyNets "Schematic Supply Nets" [InNet('+5V')] p6: voltage=0.000
SupplyNets "Schematic Supply Nets_9" [InNet('DRV_PGND')] p7: voltage=0.000
SupplyNets "Schematic Supply Nets_8" [InNet('DRV_AGND')] p8: voltage=0.000
SupplyNets "Schematic Supply Nets_6" [InNet('+3V3')] p9: voltage=0.000
SupplyNets "Schematic Supply Nets_2" [InNet('DRV_VDRAIN')] p10: voltage=0.000
Width Width_BGA_PWR [InNetClass('PWR') and WithinRoom('BGA')] p1: maxlimit=100 minlimit=6 preferedwidth=6
Width Width_PWR [InNetClass('PWR')] p2: maxlimit=100 minlimit=10 preferedwidth=10
Width Width_S50 [(InNetClass('SDRAM_ADR') OR InNetClass('SDRAM_CLK') OR InNetClass('SDRAM_CTL') OR InNetClass('SDRAM_DAT'))] p3: maxlimit=6.16 minlimit=5.61 preferedwidth=6.16 toplayer_minwidth=6.16 midlayer1_maxwidth=5.61 midlayer1_prefwidth=5.61 bottomlayer_minwidth=6.16 impedanceprofiledriven=TRUE impedanceprofileid={1F5F69A9-DDB6-4D04-8C37-54231DBB4042} impedanceprofilevalue=50.000000 minimp=50.000000 maximp=50.000000 favimp=50.000000
Width Width_BGA [WithinRoom('BGA')] p4: maxlimit=50 minlimit=3 preferedwidth=3.5
Width [All] p5: maxlimit=50 minlimit=3.5 preferedwidth=6
20 further rules are at their usual default settings.

## Classes and differential pairs
net class CLS_TRACE: SWCLK SWDIO SWO T0 T1 T2 T3 TCLK
net class CLS_NTC: NetC1204_1 NetC1205_1 TMP_CH0 TMP_CH1
net class CLS_NOR: NOR_CS NOR_IO0 NOR_IO1 NOR_IO2 NOR_IO3 NOR_IO4 NOR_IO5 NOR_IO6 NOR_IO7 NOR_SCLK
net class CLS_EMMC: CLK CMD DE EMMC_CLK EMMC_D0 EMMC_D1 EMMC_D2 EMMC_D3 EMMC_D4 EMMC_D5 EMMC_D6 EMMC_D7 HSYNC LCD_VSYNC
net class CLS_DRV_SPI: DRV_CS DRV_SCLK DRV_SDI DRV_SDO
net class CLS_DRV_PWM: DRV_AH DRV_BH DRV_CH NetR302_2 NetR303_2 NetR304_2
net class CLS_DRV_CTL: DRV_CAL DRV_EN DRV_FLT
net class CLS_DRV_AN: DRV_SNS_A DRV_SNS_B DRV_SNS_BUS DRV_SNS_C
component class TEMP: C1200 C1201 C1202 C1203 C1204 C1205 C1206 C1207 R1200 R1201 R1202 R1203 R1204 R1205 R1206 R1207 R1208 R1209 R1210 R1211 R1212 R1213 R1214 R1215 R1216 RT1200 RT1201 RT1202 RT1203 U1200 U1201 U1202 U1203
component class NOR: C1000 C1001 R1000 R1001 R1002 R1003 R1004 R1005 R1006 R1007 R1008 U1000 U1001
component class DEBUG: C1100 C1101 C1102 C1103 C1104 C1105 C1106 C1107 C1108 C1109 C1110 C1111 C1112 C1113 C1114 C1115 C1116 C1117 C1118 C1119 C1120 C1121 D1100 D1101 J1100 Q1100 R1100 R1101 R1102 R1103 R1104 R1105 R1106 R1107 R1108 R1109 R1110 R1111 R1112 R1113 R1114 R1115 U1100 U1101 U1102 U1103 U1104 U1105 U1106 U1107 U1108 U1109 U1110 U1111 U1112 U1113 U1114 U1115 U1116 U1117 U1118 U1119 U1120
net class CLS_LCD: B0 B1 B2 B3 B4 B5 B6 B7 G0 G1 G2 G3 G4 G5 G6 G7 LCD_R0 LCD_R1 LCD_R2 LCD_R3 LCD_R4 LCD_R5 LCD_R6 LCD_R7
component class EMMC: C900 C901 C902 C903 C904 C905 C906 C907 C908 C909 C910 R900 R901 R902 R903 R904 R905 R906 R907 R908 R909 R910 R911 R912 R913 R914 R915 R916 R917 R918 R919 R920 R921 U900
component class LCD: D800 J800 R800 R801 R802 U800 U801 U802 U803 U804 U805 U806 U807
net class CLS_PWR: +3.3V +3V3 +5V DRV_AGND DRV_PGND DRV_VDRAIN GMCUA GNTC NetC202_2 NetL200_1 NetL201_1 VBAT VMCUA VREF+
component class MCU_SIG: C700 C701 C702 C703 C704 C705 R700 R701 R702 R703 R704 R705 R706 R707 R708 R709 R710 R711 R712 R713 R714 R715 R716 R717 R718 R719 R720 R721 R722 R723 R724 R725 R726 R727 R728 R729 R730 R731 R732 R733 R734 R735 R736 R737 R738 R739 R740 R741 R742 R743 R744 R745 R746 R747 R748 R749 R750 R751 R752 R753 R754 R755 R756 R757 R758 R759 R760 R761 R762 R763 R764 R765 R766 R767 R768 R769 R770 R771 R772 R773 R774 R775 R776 R777 R778 R779 R780 R781 R782 R783 R784 R785 R786 R787 U600 U701 Y700 Y701
component class MCU_PWR: C600 C601 C602 C603 C604 C605 C606 C607 C608 C609 C610 C611 C612 C613 C614 C615 C616 C617 C618 C619 C620 C621 C622 C623 C624 C625 C626 C627 C628 C629 C630 C631 C632 C633 L600 R600
component class BGA: U400
net class SDRAM_DAT: D0 D1 D2 D3 D4 D5 D6 D7 D8 D9 D10 D11 D12 D13 D14 D15 D16 D17 D18 D19 D20 D21 D22 D23 D24 D25 D26 D27 D28 D29 D30 D31 DM0 DM1 DM2 DM3
net class SDRAM_CTL: SDRAM_CAS SDRAM_CKE SDRAM_CS SDRAM_RAS SDRAM_WE
net class SDRAM_CLK: SDRAM_CLK
net class SDRAM_ADR: A0 A1 A2 A3 A4 A5 A6 A7 A8 A9 A10 A11 BA0 BA1

## Components (designator, comment, footprint, x,y, rotation, side; value= is the part's Value field where it differs from the comment)
C200 "C-NOMO" C0805 3687.82,3107.27 r0 top value=22uF
C201 "C-NOMO" C0805 3687.82,3197.5 r0 top value=22uF
C202 "C-NOMO" C0805 3235.27,2058.86 r90 top value=10uF
C203 "C-NOMO" C0805 3512.54,2264.65 r180 top value=10uF
C204 "C-NOMO" C0805 3280.77,2934.68 r0 top value=10uF
C205 "C-NOMO" C0603 3288.65,3015.69 r0 top value=100nF
C206 "C-NOMO" C0402 3310.3,3079.31 r0 top value=3.3nF
C207 "C-NOMO" C0402 3234.95,1967.16 r0 top value=100nF
C208 "C-NOMO" C0805 4201.62,1415.46 r0 top value=10uF
C209 "C-NOMO" C0805 3856.17,1324.55 r0 top value=10uF
C210 "C-NOMO" C0805 3675.57,2713.27 r0 top value=22uF
C211 "C-NOMO" C0805 3675.57,2803.5 r0 top value=22uF
C212 "C-NOMO" C0402 3761.96,1322.08 r90 top value=100nF
C213 "C-NOMO" C0805 3268.52,2540.68 r0 top value=10uF
C214 "C-NOMO" C0603 3276.4,2621.69 r0 top value=100nF
C215 "C-NOMO" C0402 3298.05,2685.31 r0 top value=3.3nF
C300 "C-NOMO" C0603 5055.76,2687.14 r270 top value=2.2uF
C301 "C-NOMO" C0603 4237.96,1796.06 r135 top value=2.2uF
C302 "C-NOMO" C0603 3963.09,2211.15 r315 top value=1uF
C303 "C-NOMO" C0603 4194.13,1754.47 r315 top value=1uF
C304 "C-NOMO" C0603 4658.91,2166.1 r270 top value=2.2uF
C305 "C-NOMO" C0805 4145.96,1694.68 r315 top value=47nF
C306 "C-NOMO" C0603 5056.69,1733.41 r270 top value=2.2uF
C307 "C-NOMO" C0603 3793.34,2043.29 r135 top value=1uF
C308 "C-NOMO" C0603 4217.08,2145.87 r45 top value=10nF
C309 "C-NOMO" C0402 6275,1122 r90 top value=1nF
C310 "C-NOMO" C0402 6565,1122 r90 top value=1nF
C311 "C-NOMO" C0402 6845,1122 r90 top value=1nF
C312 "C-NOMO" C0603 4326.43,1885.6 r135 top value=1uF
C400 "C-NOMO" C0402 3947.64,3252.05 r180 top value=100nF
C401 "C-NOMO" C0402 3947.64,3296.46 r180 top value=100nF
C402 "C-NOMO" C0402 4028.27,3074.42 r180 top value=100nF
C403 "C-NOMO" C0402 3947.64,3207.64 r180 top value=100nF
C404 "C-NOMO" C0402 3947.64,3074.42 r180 top value=100nF
C405 "C-NOMO" C0402 3947.64,3118.83 r180 top value=100nF
C406 "C-NOMO" C0402 3947.64,3163.24 r180 top value=100nF
C407 "C-NOMO" C0402 4028.27,3296.46 r180 top value=100nF
C408 "C-NOMO" C0402 4030.2,3352.87 r180 top value=100nF
C409 "C-NOMO" C0402 4030.2,3397.28 r180 top value=100nF
C410 "C-NOMO" C0402 4028.27,3252.05 r180 top value=100nF
C411 "C-NOMO" C0402 4028.27,3118.83 r180 top value=100nF
C412 "C-NOMO" C0402 4028.27,3163.24 r180 top value=100nF
C413 "C-NOMO" C0402 4028.27,3207.64 r180 top value=100nF
C600 "C-NOMO" C0603 4018.74,2645.61 r90 top value=4.7uF
C601 "C-NOMO" C0402 4278.71,2547.07 r90 top value=100nF
C602 "C-NOMO" C0402 4234.3,2547.07 r90 top value=100nF
C603 "C-NOMO" C0402 4189.89,2547.07 r90 top value=100nF
C604 "C-NOMO" C0402 4101.07,2466.44 r90 top value=100nF
C605 "C-NOMO" C0402 4056.66,2466.44 r90 top value=100nF
C606 "C-NOMO" C0402 4012.25,2466.44 r90 top value=100nF
C607 "C-NOMO" C0402 4145.48,2547.07 r90 top value=100nF
C608 "C-NOMO" C0402 4182.48,2663.53 r90 top value=100nF
C609 "C-NOMO" C0402 4226.89,2663.53 r90 top value=100nF
C610 "C-NOMO" C0402 4056.66,2547.07 r90 top value=100nF
C611 "C-NOMO" C0402 4101.07,2547.07 r90 top value=100nF
C612 "C-NOMO" C0402 4271.3,2663.53 r90 top value=100nF
C613 "C-NOMO" C0402 4012.25,2547.07 r90 top value=100nF
C614 "C-NOMO" C0402 4145.48,2466.44 r90 top value=100nF
C615 "C-NOMO" C0402 4278.71,2385.81 r90 top value=100nF
C616 "C-NOMO" C0402 4234.3,2385.81 r90 top value=100nF
C617 "C-NOMO" C0402 4189.89,2385.81 r90 top value=100nF
C618 "C-NOMO" C0402 4101.07,2305.18 r90 top value=100nF
C619 "C-NOMO" C0402 4056.66,2305.18 r90 top value=100nF
C620 "C-NOMO" C0402 4012.25,2305.18 r90 top value=100nF
C621 "C-NOMO" C0402 4145.48,2385.81 r90 top value=100nF
C622 "C-NOMO" C0603 4076.15,2645.61 r90 top value=2.2uF
C623 "C-NOMO" C0603 4268.04,2779.79 r90 top value=2.2uF
C624 "C-NOMO" C0603 4210.63,2779.79 r90 top value=2.2uF
C625 "C-NOMO" C0402 4278.71,2466.44 r90 top value=100nF
C626 "C-NOMO" C0402 4234.3,2466.44 r90 top value=100nF
C627 "C-NOMO" C0402 4189.89,2466.44 r90 top value=100nF
C628 "C-NOMO" C0603 4153.23,2779.79 r90 top value=1uF
C629 "C-NOMO" C0402 4101.07,2385.81 r90 top value=100nF
C630 "C-NOMO" C0603 4095.83,2779.79 r90 top value=1uF
C631 "C-NOMO" C0402 4056.66,2385.81 r90 top value=100nF
C632 "C-NOMO" C0805 4028.59,2770.93 r90 top value=10uF
C633 "C-NOMO" C0402 4012.25,2385.81 r90 top value=100nF
C700 "C-NOMO" C0402 5597.13,3700.72 r180 top value=100nF
C701 "C-NOMO" C0402 5672.53,3718.67 r90 top value=100nF
C702 "C-NOMO" C0402 5413.92,3688.63 r180 top value=100nF
C703 "C-NOMO" C0402 5602.51,3573.27 r180 top value=100nF
C704 "C-NOMO" C0402 5606.95,3612.76 r180 top value=100nF
C705 "C-NOMO" C0402 5600.72,3747.4 r180 top value=100nF
C900 "C-NOMO" C0603 3478.26,3585.49 r180 bottom value=2.2uF
C901 "C-NOMO" C0603 3649.52,3843.49 r270 bottom value=2.2uF
C902 "C-NOMO" C0402 3499.91,3675.4 r0 bottom value=100nF
C903 "C-NOMO" C0402 3598.4,3821.83 r270 bottom value=100nF
C904 "C-NOMO" C0402 3499.91,3634.94 r180 bottom value=100nF
C905 "C-NOMO" C0402 3520.64,3722.65 r0 bottom value=100nF
C906 "C-NOMO" C0402 3432.99,3722.65 r180 bottom value=100nF
C907 "C-NOMO" C0402 3576.9,3675.4 r180 bottom value=100nF
C908 "C-NOMO" C0402 3333.65,3675.54 r90 bottom value=100nF
C909 "C-NOMO" C0402 3333.65,3767.71 r270 bottom value=100nF
C910 "C-NOMO" C0603 3569.03,3594.54 r90 bottom value=2.2uF
C1000 "C-NOMO" C0402 5211.9,3358.11 r180 top value=100nF
C1001 "C-NOMO" C0402 5211.9,3313.7 r180 top value=100nF
C1100 "C-NOMO" C0402 5539.29,3156.12 r180 top value=100nF
C1101 "C-NOMO" C0402 5539.29,3200.53 r180 top value=100nF
C1102 "C-NOMO" C0402 5539.29,3244.94 r180 top value=100nF
C1103 "C-NOMO" C0402 5539.29,3022.9 r180 top value=100nF
C1104 "C-NOMO" C0402 5539.29,3067.3 r180 top value=100nF
C1105 "C-NOMO" C0402 5539.29,3111.71 r180 top value=100nF
C1106 "C-NOMO" C0402 5539.29,3422.58 r180 top value=100nF
C1107 "C-NOMO" C0402 5539.29,3466.99 r180 top value=100nF
C1108 "C-NOMO" C0402 5539.29,3511.4 r180 top value=100nF
C1109 "C-NOMO" C0402 5539.29,3289.35 r180 top value=100nF
C1110 "C-NOMO" C0402 5539.29,3333.76 r180 top value=100nF
C1111 "C-NOMO" C0402 5539.29,3378.17 r180 top value=100nF
C1112 "C-NOMO" C0402 5458.27,3466.08 r180 top value=100nF
C1113 "C-NOMO" C0402 5458.27,3510.49 r180 top value=100nF
C1114 "C-NOMO" C0402 5539.29,2756.44 r180 top value=100nF
C1115 "C-NOMO" C0402 5458.27,3377.27 r180 top value=100nF
C1116 "C-NOMO" C0402 5458.27,3421.68 r180 top value=100nF
C1117 "C-NOMO" C0402 5539.29,2978.49 r180 top value=100nF
C1118 "C-NOMO" C0402 5539.29,2889.67 r180 top value=100nF
C1119 "C-NOMO" C0402 5539.29,2845.26 r180 top value=100nF
C1120 "C-NOMO" C0402 5539.29,2800.85 r180 top value=100nF
C1121 "C-NOMO" C0402 5539.29,2934.08 r180 top value=100nF
C1200 "C-NOMO" C0402 4592.11,2554.09 r90 top value=10pF
C1201 "C-NOMO" C0402 3547.25,2350.98 r270 top value=10pF
C1202 "C-NOMO" C0402 4547.7,2554.09 r90 top value=100nF
C1203 "C-NOMO" C0402 3591.66,2350.98 r270 top value=100nF
C1204 "C-NOMO" C0402 5730.65,1289.67 r90 top value=10pF
C1205 "C-NOMO" C0402 4118.6,1543.92 r90 top value=10pF
C1206 "C-NOMO" C0402 5686.24,1289.67 r90 top value=100nF
C1207 "C-NOMO" C0402 4074.19,1543.92 r90 top value=100nF
D200 "SMAJ33CA" SMAJ33CA 3597.34,1194.02 r0 top
D201 "SMAJ33CA" SMAJ33CA 3511.19,2080.23 r270 top
D300 "SMF15CA" SMF15CA 5210.9,2692.28 r0 top
D301 "SMF15CA" SMF15CA 4817.85,2316.49 r180 top
D302 "SMF15CA" SMF15CA 4818.06,2172.99 r0 top
D303 "SMF15CA" SMF15CA 4846.48,1508.06 r180 top
D304 "SMF15CA" SMF15CA 5209.35,1738.79 r0 top
D305 "SMF15CA" SMF15CA 4848.3,1208.31 r0 top
D800 "PESD5V0H1BSF" PESD5V0H1BSF 5908.15,2723.53 r90 top
D1100 "PESD5V0H1BSF" PESD5V0H1BSF 5681.46,3273.25 r180 top
D1101 "PESD5V0H1BSF" PESD5V0H1BSF 5681.46,3307.03 r180 top
J200 "XT60PW-M" XT60PW-M 3432.19,1607.78 r90 top
J300 "LCC40PW-M" LCC40PW-M 6101.54,1978.87 r270 top
J800 "AFC01-S40FCA-00" AFC01-S40FCA-00 6001.64,3241.16 r90 top
J1100 "AFC01-S40FCA-00" AFC01-S40FCA-00 5624.76,3941.18 r180 top
L200 "L" FXL0420 3655.34,2969.75 r0 top value=2.2uH
L201 "L" FXL0420 3643.09,2575.75 r0 top value=2.2uH
L600 "BLM15PD121SN1D" L0402 4145.48,2305.97 r90 top value=120R@100MHz
Q200 "CSD18534Q5A" CSD18534Q5A 3310.08,2285.49 r270 top
Q201 "IAUC100N04S6N022" IAUC100N04S6N022 4118.98,1246.05 r0 top
Q300 "IAUC100N04S6N022" IAUC100N04S6N022 5209.86,2494.95 r180 top
Q301 "IAUC100N04S6N022" IAUC100N04S6N022 5209.66,2233.51 r0 top
Q302 "IAUC100N04S6N022" IAUC100N04S6N022 4813.11,1972.27 r180 top
Q303 "IAUC100N04S6N022" IAUC100N04S6N022 4812.91,1706.43 r0 top
Q304 "IAUC100N04S6N022" IAUC100N04S6N022 5209.43,1526.88 r180 top
Q305 "IAUC100N04S6N022" IAUC100N04S6N022 5209.92,1265.8 r0 top
Q1100 "SK2301AAT" SK2301AAT 5092,3319.55 r180 top
R200 "R" R0402 3538.53,3152.1 r90 top value=100K
R201 "R" R0603 3483.45,3173.75 r90 top value=562K
R202 "R" R1206 3789.07,1495.36 r90 top value=0R
R203 "R" R0603 3418.53,3173.75 r270 top value=180K
R204 "R" R0402 3526.28,2758.1 r90 top value=100K
R205 "R" R0603 3406.28,2779.75 r90 top value=953K
R206 "R" R0603 3471.2,2779.75 r270 top value=180K
R300 "R" R0805 4757.67,2624.43 r0 top value=0R5
R301 "R" R0603 5363.8,2685.32 r270 top value=100K
R302 "R" R0402 3905.35,1768.83 r45 top value=10K
R303 "R" R0402 3934.81,1739.38 r45 top value=10K
R304 "R" R0402 3964.26,1709.93 r45 top value=10K
R305 "R" R0805 4652.79,2314.51 r90 top value=0R5
R306 "R" R0402 3866.82,2090.42 r315 top value=10K
R307 "R" R0603 4971.3,2286.48 r270 top value=100K
R308 "R" R0402 4168.58,2172.44 r225 top value=33R
R309 "R" R0805 4524.3,2145.46 r0 top value=0R5
R310 "R" R0603 4970.9,2165.12 r270 top value=100K
R311 "R" R0402 3942.43,2165.27 r315 top value=33R
R312 "R" R0402 4118.53,2222.78 r225 top value=33R
R313 "R" R0402 4143.6,2197.7 r225 top value=33R
R314 "R" R0805 4524.3,1511.53 r0 top value=0R5
R315 "R" R0603 4686.61,1509.88 r90 top value=100K
R316 "R" R0402 3841.75,2065.48 r315 top value=33R
R317 "R" R0402 3892.09,2115.31 r315 top value=33R
R318 "R" R2512 4841.55,2494.93 r0 top value=0R005
R319 "R" R0402 3917.35,2140.2 r315 top value=33R
R320 "R" R0805 4524.3,1420.74 r0 top value=0R5
R321 "R" R0603 5362.69,1732.06 r270 top value=100K
R322 "R" R0603 4260.78,2107.67 r45 top value=47K
R323 "R" R0603 4299.98,2068.48 r45 top value=6.8K
R324 "R" R0805 4524.3,1182.82 r0 top value=0R5
R325 "R" R0603 4690.24,1202.86 r90 top value=100K
R326 "R" R2512 4535.12,1734.44 r270 top value=0R005
R327 "R" R0805 3835.43,1839.28 r315 top value=0R
R328 "R" R2512 4815.87,1358.18 r0 top value=0R005
R329 "R" R0603 4279.57,1840.42 r135 top value=10R
R600 "R" R0603 4132.56,2646.6 r90 top value=0R
R700 "R" R0402 4854.35,3404.26 r180 top value=33R
R701 "R" R0402 4854.35,3368.49 r180 top value=33R
R702 "R" R0402 4854.35,3440.02 r180 top value=33R
R703 "R" R0402 4854.35,3511.54 r180 top value=33R
R704 "R" R0402 4854.35,3475.78 r180 top value=33R
R705 "R" R0402 4980.93,3550.03 r180 top value=33R
R706 "R" R0402 4980.93,3514.19 r180 top value=33R
R707 "R" R0402 4980.93,3585.86 r180 top value=33R
R708 "R" R0402 4854.35,3332.73 r180 top value=33R
R709 "R" R0402 4980.93,3335.03 r180 top value=33R
R710 "R" R0402 4854.35,3189.68 r180 top value=33R
R711 "R" R0402 4854.35,3153.92 r180 top value=33R
R712 "R" R0402 4854.35,3225.45 r180 top value=33R
R713 "R" R0402 4854.35,3296.97 r180 top value=33R
R714 "R" R0402 4854.35,3261.21 r180 top value=33R
R715 "R" R0402 4854.35,3583.07 r180 top value=33R
R716 "R" R0402 4854.35,3547.31 r180 top value=33R
R717 "R" R0402 4854.35,3046.64 r180 top value=33R
R718 "R" R0402 4854.35,3118.16 r180 top value=33R
R719 "R" R0402 4854.35,3082.4 r180 top value=33R
R720 "R" R0402 4980.93,3478.36 r180 top value=33R
R721 "R" R0402 4631.86,3658.03 r90 top value=33R
R722 "R" R0402 4013.36,2907.41 r135 top value=33R
R723 "R" R0402 4673.52,3658.03 r90 top value=33R
R724 "R" R0402 4980.93,3048.36 r180 top value=33R
R725 "R" R0402 4715.17,3658.03 r90 top value=33R
R726 "R" R0402 4782.39,2992.12 r135 top value=33R
R727 "R" R0402 5410.33,3640.16 r180 top value=33R
R728 "R" R0402 4745.32,2934.57 r225 top value=33R
R729 "R" R0402 4118.46,2928.94 r225 top value=33R
R730 "R" R0402 4119.09,3015.34 r315 top value=33R
R731 "R" R0402 4980.93,3299.19 r180 top value=33R
R732 "R" R0402 4980.93,3263.36 r180 top value=33R
R733 "R" R0402 4980.93,3370.86 r180 top value=33R
R734 "R" R0402 4980.93,3442.53 r180 top value=33R
R735 "R" R0402 4980.93,3406.69 r180 top value=33R
R736 "R" R0402 4980.93,3120.03 r180 top value=33R
R737 "R" R0402 4980.93,3084.2 r180 top value=33R
R738 "R" R0402 4980.93,3155.86 r180 top value=33R
R739 "R" R0402 4980.93,3227.53 r180 top value=33R
R740 "R" R0402 4980.93,3191.7 r180 top value=33R
R741 "R" R0402 4418.94,2887.09 r90 top value=33R
R742 "R" R0402 4381.1,2887.09 r90 top value=33R
R743 "R" R0402 4294.5,3657.86 r90 top value=33R
R744 "R" R0402 4377.81,3657.86 r90 top value=33R
R745 "R" R0402 4336.16,3657.86 r90 top value=33R
R746 "R" R0402 4343.26,2887.09 r90 top value=33R
R747 "R" R0402 4191.9,2887.09 r90 top value=33R
R748 "R" R0402 4154.06,2887.09 r90 top value=33R
R749 "R" R0402 4229.74,2887.09 r90 top value=33R
R750 "R" R0402 4305.42,2887.09 r90 top value=33R
R751 "R" R0402 4267.58,2887.09 r90 top value=33R
R752 "R" R0402 4419.46,3657.86 r90 top value=33R
R753 "R" R0402 4128.58,3657.86 r90 top value=33R
R754 "R" R0402 4086.92,3657.86 r90 top value=33R
R755 "R" R0402 4170.23,3657.86 r90 top value=33R
R756 "R" R0402 4253.54,3657.86 r90 top value=33R
R757 "R" R0402 4211.88,3657.86 r90 top value=33R
R758 "R" R0402 4045.27,3657.86 r90 top value=33R
R759 "R" R0402 4502.77,3657.86 r90 top value=33R
R760 "R" R0402 4461.12,3657.86 r90 top value=33R
R761 "R" R0402 4544.42,3657.86 r90 top value=33R
R762 "R" R0402 4003.62,3657.86 r90 top value=33R
R763 "R" R0402 4586.08,3657.86 r90 top value=33R
R764 "R" R0402 4866.29,2965.78 r135 top value=33R
R765 "R" R0402 3942.87,3937.06 r90 top value=33R
R766 "R" R0402 3901.22,3937.06 r90 top value=33R
R767 "R" R0402 3649.67,3374.9 r90 top value=33R
R768 "R" R0402 3732.97,3374.9 r90 top value=33R
R769 "R" R0402 3691.32,3374.9 r90 top value=33R
R770 "R" R0402 3859.57,3937.06 r90 top value=33R
R771 "R" R0402 3692.95,3937.06 r90 top value=33R
R772 "R" R0402 3651.3,3937.06 r90 top value=10K
R773 "R" R0402 3734.61,3937.06 r90 top value=33R
R774 "R" R0402 3817.91,3937.06 r90 top value=33R
R775 "R" R0402 3776.26,3937.06 r90 top value=51R
R776 "R" R0402 3774.63,3374.9 r90 top value=33R
R777 "R" R0402 4570.29,2887.09 r90 top value=33R
R778 "R" R0402 4532.46,2887.09 r90 top value=33R
R779 "R" R0402 4608.13,2887.09 r90 top value=33R
R780 "R" R0402 4683.81,2887.09 r90 top value=33R
R781 "R" R0402 4645.97,2887.09 r90 top value=51R
R782 "R" R0402 4494.62,2887.09 r90 top value=33R
R783 "R" R0402 3857.93,3374.9 r90 top value=33R
R784 "R" R0402 3816.28,3374.9 r90 top value=10K
R785 "R" R0402 3899.59,3374.9 r90 top value=10K
R786 "R" R0402 4456.78,2887.09 r90 top value=10K
R787 "R" R0402 3941.24,3374.9 r90 top value=10K
R800 "R" R0402 5787.13,2706.8 r90 top value=1K
R801 "R" R0402 5870.44,2706.8 r90 top value=100R
R802 "R" R0402 5828.78,2706.8 r90 top value=100R
R900 "R" R0402 3938.96,3730.17 r90 top value=47K
R901 "R" R0402 3893.48,3730.17 r270 top value=22R
R902 "R" R0402 3848,3834.24 r90 top value=47K
R903 "R" R0402 3802.53,3834.24 r270 top value=22R
R904 "R" R0402 3938.96,3834.24 r90 top value=47K
R905 "R" R0402 3893.48,3834.24 r270 top value=22R
R906 "R" R0402 3848,3730.17 r90 top value=47K
R907 "R" R0402 3802.53,3730.17 r270 top value=22R
R908 "R" R0402 3849.59,3461.7 r90 top value=47K
R909 "R" R0402 3804.11,3461.7 r270 top value=22R
R910 "R" R0402 3940.54,3461.7 r90 top value=47K
R911 "R" R0402 3895.07,3461.7 r270 top value=22R
R912 "R" R0402 3849.59,3565.77 r90 top value=47K
R913 "R" R0402 3804.11,3565.77 r270 top value=22R
R914 "R" R0402 3940.54,3565.77 r90 top value=47K
R915 "R" R0402 3895.07,3565.77 r270 top value=22R
R916 "R" R0402 3372.33,3918.92 r0 top value=10K
R917 "R" R0402 3451.74,3918.92 r0 top value=22R
R918 "R" R0402 3820.24,3651.15 r180 top value=22R
R919 "R" R0402 3531.14,3918.92 r180 top value=47K
R920 "R" R0402 3531.14,3376.06 r180 top value=47K
R921 "R" R0402 3451.88,3376.06 r180 top value=0R
R1000 "R" R0402 4759.7,3659.19 r90 top value=10K
R1001 "R" R0402 5211.11,3442.8 r180 top value=33R
R1002 "R" R0402 5211.11,3401.14 r180 top value=33R
R1003 "R" R0402 4801.35,3659.19 r90 top value=33R
R1004 "R" R0402 4967.96,3659.19 r90 top value=33R
R1005 "R" R0402 5009.62,3659.19 r90 top value=33R
R1006 "R" R0402 4926.31,3659.19 r90 top value=33R
R1007 "R" R0402 4843,3659.19 r90 top value=33R
R1008 "R" R0402 4884.66,3659.19 r90 top value=33R
R1100 "R" R0402 5619.13,3213.25 r180 top value=47K
R1101 "R" R0402 5619.13,3171.6 r180 top value=33R
R1102 "R" R0402 5619.13,3129.94 r180 top value=33R
R1103 "R" R0402 5619.13,3254.9 r180 top value=33R
R1104 "R" R0402 5619.13,3379.87 r180 top value=33R
R1105 "R" R0402 5619.13,3338.21 r180 top value=33R
R1106 "R" R0402 5619.13,3296.56 r180 top value=33R
R1107 "R" R0402 5619.13,2838.37 r180 top value=33R
R1108 "R" R0402 5619.13,2880.02 r180 top value=33R
R1109 "R" R0402 5619.13,2755.06 r180 top value=33R
R1110 "R" R0402 5619.13,2796.71 r180 top value=33R
R1111 "R" R0402 5619.13,2921.68 r180 top value=33R
R1112 "R" R0402 5619.13,3046.64 r180 top value=10K
R1113 "R" R0402 5619.13,3088.29 r180 top value=33R
R1114 "R" R0402 5619.13,2963.33 r180 top value=33R
R1115 "R" R0402 5619.13,3004.98 r180 top value=33R
R1200 "R" R0402 4420.79,2717.86 r180 top value=0R
R1201 "R" R0402 4635.14,2554.87 r90 top value=10K
R1202 "R" R0402 4552.73,2467.09 r90 top value=1.5K
R1203 "R" R0402 3504.22,2350.2 r270 top value=10K
R1204 "R" R0402 3462.57,2350.2 r270 top value=1.5K
R1205 "R" R0402 4636.04,2467.09 r90 top value=9.1K
R1206 "R" R0402 3590.79,2433.91 r270 top value=9.1K
R1207 "R" R0402 4594.39,2467.09 r90 top value=6.2K
R1208 "R" R0402 3503.65,2427.59 r270 top value=6.2K
R1209 "R" R0402 5689.73,1204.9 r90 top value=10K
R1210 "R" R0402 5731.39,1204.9 r90 top value=1.5K
R1211 "R" R0402 4161.63,1544.71 r90 top value=10K
R1212 "R" R0402 4203.28,1544.71 r90 top value=1.5K
R1213 "R" R0402 5814.69,1204.9 r90 top value=9.1K
R1214 "R" R0402 4286.59,1544.71 r90 top value=9.1K
R1215 "R" R0402 5773.04,1204.9 r90 top value=6.2K
R1216 "R" R0402 4244.94,1544.71 r90 top value=6.2K
RT1200 "NCP15XH103F03RC" NTC0402 4479.74,2394.47 r180 top value="10K 3380"
RT1201 "NCP15XH103F03RC" NTC0402 3549.14,2430 r270 top value="10K 3380"
RT1202 "NCP15XH103F03RC" NTC0402 5774.95,1288.13 r90 top value="10K 3380"
RT1203 "NCP15XH103F03RC" NTC0402 4328.24,1548.62 r90 top value="10K 3380"
U200 "TPS62130RGTR" TPS62130RGTR 3449.67,3016 r180 top
U201 "LM74700QDBVR-Q1" LM74700QDBVR-Q1 3353.88,2035.73 r90 top
U202 "TPS62130RGTR" TPS62130RGTR 3437.42,2622 r180 top
U203 "LM74700QDBVR-Q1" LM74700QDBVR-Q1 3832.21,1199.77 r0 top
U300 "DRV8323RSRGZR" DRV8323RSRGZR 4045.93,1956.79 r135 top
U400 "IS42S32800J-6BLI" IS42S32800J-6BLI 4351.05,3884.45 r90 top
U600 "STM32H750XBH6" STM32H750XBH6 4416.59,3307.85 r90 top
U701 "SN74LVC1G08DCKR" SN74LVC1G08DCKR 5310.01,3683.6 r90 top
U800 "TPESD8004MUTAG" TPESD8004MUTAG 5792.87,3092.53 r180 top
U801 "TPESD8004MUTAG" TPESD8004MUTAG 5792.87,2968.36 r180 top
U802 "TPESD8004MUTAG" TPESD8004MUTAG 5792.87,2844.2 r180 top
U803 "TPESD8004MUTAG" TPESD8004MUTAG 5792.87,3216.7 r180 top
U804 "TPESD8004MUTAG" TPESD8004MUTAG 5792.87,3589.19 r180 top
U805 "TPESD8004MUTAG" TPESD8004MUTAG 5792.87,3713.36 r180 top
U806 "TPESD8004MUTAG" TPESD8004MUTAG 5792.87,3340.86 r180 top
U807 "TPESD8004MUTAG" TPESD8004MUTAG 5792.87,3465.03 r180 top
U900 "KLMAG2GEND-B031" KLMAG2GEND-B031 3490.13,3653.32 r270 top
U1000 "MX25L25645GZ2I-08G" MX25L25645GZ2I-08G 4750.61,3898.61 r90 top
U1001 "MX25L25645GZ2I-08G" MX25L25645GZ2I-08G 5012.6,3898.61 r90 top
U1100 "SN74AXC2T245RSWR" SN74AXC2T245RSWR 5353.64,3063.76 r180 top
U1101 "SN74LVC1G14DRYR" SN74LVC1G14DRYR 5689.37,3147 r180 top
U1102 "TXB0101DCKR" TXB0101DCKR 5105.78,3223.76 r180 top
U1103 "SN74AXC1T45DEAR" SN74AXC1T45DEAR 5689.37,3225.69 r180 top
U1104 "TXV0106BQBR" TXV0106BQBR 5124.7,3104.35 r90 top
U1105 "74LVC2G17GM,115" 74LVC2G17GM,115 5689.37,2786.19 r180 top
U1106 "74LVC2G17GM,115" 74LVC2G17GM,115 5689.37,2877.68 r180 top
U1107 "SN74AXC4T774RSVR" SN74AXC4T774RSVR 5361.52,2941.4 r180 top
U1108 "74LVC2G17GM,115" 74LVC2G17GM,115 5689.37,2969.17 r180 top
U1109 "74LVC2G17GM,115" 74LVC2G17GM,115 5689.37,3060.66 r180 top
U1110 "TPESD8004MUTAG" TPESD8004MUTAG 5458.46,2923.35 r180 top
U1111 "TPESD8004MUTAG" TPESD8004MUTAG 5458.46,3047.52 r180 top
U1112 "TXS0102DQER" TXS0102DQER 5617.17,3446.5 r180 top
U1113 "SN74AXC4T774RSVR" SN74AXC4T774RSVR 5238.65,2942.28 r180 top
U1114 "SN74AVC4T245RSVR" SN74AVC4T245RSVR 5088.06,3432.07 r180 top
U1115 "TPESD8004MUTAG" TPESD8004MUTAG 5348.72,3306.19 r180 top
U1116 "TPESD8004MUTAG" TPESD8004MUTAG 5348.72,3430.35 r180 top
U1117 "TPESD8004MUTAG" TPESD8004MUTAG 5458.46,3171.68 r180 top
U1118 "TPESD8004MUTAG" TPESD8004MUTAG 5348.72,3182.02 r180 top
U1119 "TPESD8004MUTAG" TPESD8004MUTAG 5458.46,2799.19 r180 top
U1120 "TPESD8004MUTAG" TPESD8004MUTAG 5458.46,3295.85 r180 top
U1200 "TLV9061IDBVR" TLV9061IDBVR 4455.45,2511.57 r90 top
U1201 "TLV9061IDBVR" TLV9061IDBVR 3683.91,2393.5 r270 top
U1202 "TLV9061IDBVR" TLV9061IDBVR 5594,1247.15 r90 top
U1203 "TLV9061IDBVR" TLV9061IDBVR 3981.94,1501.4 r90 top
Y700 "OT252025MJBA4SL" OT252025MJBA4SL 4816.81,2897.66 r225 top value=25MHz
Y701 "OK252032768KJBA4SL" OK252032768KJBA4SL 4050.38,2977.24 r135 top value=32.768KHz

## Footprints (in the part's own frame and the unit in brackets; to place one, negate y for a bottom-side part, rotate by r counter-clockwise, add the part's x,y. Pads: shape width x height; smd on the part's side, far side on the other; paste and mask are expansions set on the pad)
74LVC2G17GM,115 [mm] "PSON, 6-Leads, Body 1.45x1.00mm, Pitch 0.60mm, IPC Medium Density"
  rrect50% 0.4x0.25 smd: 1(-0.275,0.6)
  rrect50% 0.35x0.25 smd: 2(-0.3,0) 3(-0.3,-0.6) 4(0.3,-0.6) 5(0.3,0) 6(0.3,0.6)
  silkscreen extent -0.43,0.99 -0.12,0.99, body extent -0.53,-0.75 0.53,0.75, height 0.5
AFC01-S40FCA-00 [mm]
  rect 0.3x1.3 smd: 1(-9.75,1.34) 2(-9.25,1.34) 3(-8.75,1.34) 4(-8.25,1.34) 5(-7.75,1.34) 6(-7.25,1.34) 7(-6.75,1.34) 8(-6.25,1.34) 9(-5.75,1.34) 10(-5.25,1.34) 11(-4.75,1.34) 12(-4.25,1.34) 13(-3.75,1.34) 14(-3.25,1.34) 15(-2.75,1.34) 16(-2.25,1.34) 17(-1.75,1.34) 18(-1.25,1.34) 19(-0.75,1.34) 20(-0.25,1.34) 21(0.25,1.34) 22(0.75,1.34) 23(1.25,1.34) 24(1.75,1.34) 25(2.25,1.34) 26(2.75,1.34) 27(3.25,1.34) 28(3.75,1.34) 29(4.25,1.34) 30(4.75,1.34) 31(5.25,1.34) 32(5.75,1.34) 33(6.25,1.34) 34(6.75,1.34) 35(7.25,1.34) 36(7.75,1.34) 37(8.25,1.34) 38(8.75,1.34) 39(9.25,1.34) 40(9.75,1.34)
  rect 2x1.6 smd: ""(-11.463,-1.34) ""(11.463,-1.34)
  silkscreen extent -10,-0.02 -9.5,0.49, body extent -12.15,-4.32 12.15,1.53, height 2.11
C0402 [mm] "Chip Capacitor, 2-Leads, Body 1.00x0.50mm, IPC Medium Density"
  rect 0.58x0.62 smd: 1(-0.48,0) 2(0.48,0)
  silkscreen extent -0.95,-0.5 0.95,0.5, body extent -0.53,-0.28 0.53,0.28, height 0.55
C0603 [mm] "Chip Capacitor, 2-Leads, Body 1.60x0.80mm, IPC Medium Density"
  rect 0.8x0.95 smd: 1(-0.825,0) 2(0.825,0)
  silkscreen extent -1.5,-0.75 1.5,0.75, body extent -0.85,-0.45 0.85,0.45, height 0.9
C0805 [mm] "Chip Capacitor, 2-Leads, Body 2.00x1.25mm, IPC Medium Density"
  rect 1.05x1.45 smd: 1(-0.925,0) 2(0.925,0)
  silkscreen extent -1.7,-1 1.7,1, body extent -1.1,-0.72 1.1,0.72, height 1.45
CSD18534Q5A [mm]
  rect 0.75x0.65 smd paste-2539.97: 1(2.777,-1.93) 2(2.777,-0.643) 3(2.777,0.643) 4(2.777,1.93)
  rect 0.655x0.65 smd paste-2539.97: 5(-2.777,1.93) 6(-2.777,0.643) 7(-2.777,-0.643) 8(-2.777,-1.93)
  rect 4.295x4.51 smd paste-2539.97: ""(-0.314,0)
  body extent -3,-2.55 3,2.55, height 1.05
DRV8323RSRGZR [mm] "PQFN, 48-Leads, Body 7.00x7.00mm, Pitch 0.50mm, Thermal Pad 5.15x5.15mm, IPC Medium Density"
  rrect50% 0.55x0.35 smd: 1(-3.275,2.75) 2(-3.275,2.25) 3(-3.275,1.75) 4(-3.275,1.25) 5(-3.275,0.75) 6(-3.275,0.25) 7(-3.275,-0.25) 8(-3.275,-0.75) 9(-3.275,-1.25) 10(-3.275,-1.75) 11(-3.275,-2.25) 12(-3.275,-2.75) 25(3.275,-2.75) 26(3.275,-2.25) 27(3.275,-1.75) 28(3.275,-1.25) 29(3.275,-0.75) 30(3.275,-0.25) 31(3.275,0.25) 32(3.275,0.75) 33(3.275,1.25) 34(3.275,1.75) 35(3.275,2.25) 36(3.275,2.75)
  rrect50% 0.35x0.55 smd: 13(-2.75,-3.275) 14(-2.25,-3.275) 15(-1.75,-3.275) 16(-1.25,-3.275) 17(-0.75,-3.275) 18(-0.25,-3.275) 19(0.25,-3.275) 20(0.75,-3.275) 21(1.25,-3.275) 22(1.75,-3.275) 23(2.25,-3.275) 24(2.75,-3.275) 37(2.75,3.275) 38(2.25,3.275) 39(1.75,3.275) 40(1.25,3.275) 41(0.75,3.275) 42(0.25,3.275) 43(-0.25,3.275) 44(-0.75,3.275) 45(-1.25,3.275) 46(-1.75,3.275) 47(-2.25,3.275) 48(-2.75,3.275)
  rrect5% 5.15x5.15 smd paste-2539.97: 49(0,0)
  silkscreen extent -3.55,-3.55 3.55,3.55, body extent -3.55,-3.55 3.55,3.55, height 1
FXL0420 [mm]
  rect 1.5x2.5 smd: 1(-1.85,0) 2(1.85,0)
  silkscreen extent -2.2,-2.1 2.2,2.1, body extent -2.29,-2.11 2.27,2.09, height 1.85
IAUC100N04S6N022 [mm]
  rect 1.55x0.6 smd paste-1.55 mask+0: 1(-2.995,1.905) 1(-2.995,1.905) 1(-2.995,1.905) 2(-2.995,0.635) 2(-2.995,0.635) 2(-2.995,0.635) 3(-2.995,-0.635) 3(-2.995,-0.635) 3(-2.995,-0.635) 4(-2.995,-1.905) 4(-2.995,-1.905) 4(-2.995,-1.905)
  rect 1.55x0.6 smd paste-1.35 mask+0: 5(3.1,-1.905) 5(3.1,-1.905) 5(3.1,-1.905) 6(3.1,-0.635) 6(3.1,-0.635) 6(3.1,-0.635) 7(3.1,0.635) 7(3.1,0.635) 7(3.1,0.635) 8(3.1,1.905) 8(3.1,1.905) 8(3.1,1.905)
  SIG01 region: 3.775,2.205 3.775,-2.205 -1.125,-2.205 -1.125,2.205
  SIG01 region: -2.22,2.205 -2.22,-0.935 -3.77,-0.935 -3.77,2.205 -2.995,2.205
  silkscreen extent -2.02,1.65 -1.51,2.16, body extent -3.22,-2.71 3.22,2.7, height 1.01
IS42S32800J-6BLI [mm] "BGA, 90-Leads, Body 8.00x13.00mmx1.20mm, Pitch 0.80mm"
  round 0.36 smd: A1(-3.2,5.6) A2(-2.4,5.6) A3(-1.6,5.6) A7(1.6,5.6) A8(2.4,5.6) A9(3.2,5.6) B1(-3.2,4.8) B2(-2.4,4.8) B3(-1.6,4.8) B7(1.6,4.8) B8(2.4,4.8) B9(3.2,4.8) C1(-3.2,4) C2(-2.4,4) C3(-1.6,4) C7(1.6,4) C8(2.4,4) C9(3.2,4) D1(-3.2,3.2) D2(-2.4,3.2) D3(-1.6,3.2) D7(1.6,3.2) D8(2.4,3.2) D9(3.2,3.2) E1(-3.2,2.4) E2(-2.4,2.4) E3(-1.6,2.4) E7(1.6,2.4) E8(2.4,2.4) E9(3.2,2.4) F1(-3.2,1.6) F2(-2.4,1.6) F3(-1.6,1.6) F7(1.6,1.6) F8(2.4,1.6) F9(3.2,1.6) G1(-3.2,0.8) G2(-2.4,0.8) G3(-1.6,0.8) G7(1.6,0.8) G8(2.4,0.8) G9(3.2,0.8) H1(-3.2,0) H2(-2.4,0) H3(-1.6,0) H7(1.6,0) H8(2.4,0) H9(3.2,0) J1(-3.2,-0.8) J2(-2.4,-0.8) J3(-1.6,-0.8) J7(1.6,-0.8) J8(2.4,-0.8) J9(3.2,-0.8) K1(-3.2,-1.6) K2(-2.4,-1.6) K3(-1.6,-1.6) K7(1.6,-1.6) K8(2.4,-1.6) K9(3.2,-1.6) L1(-3.2,-2.4) L2(-2.4,-2.4) L3(-1.6,-2.4) L7(1.6,-2.4) L8(2.4,-2.4) L9(3.2,-2.4) M1(-3.2,-3.2) M2(-2.4,-3.2) M3(-1.6,-3.2) M7(1.6,-3.2) M8(2.4,-3.2) M9(3.2,-3.2) N1(-3.2,-4) N2(-2.4,-4) N3(-1.6,-4) N7(1.6,-4) N8(2.4,-4) N9(3.2,-4) P1(-3.2,-4.8) P2(-2.4,-4.8) P3(-1.6,-4.8) P7(1.6,-4.8) P8(2.4,-4.8) P9(3.2,-4.8) R1(-3.2,-5.6) R2(-2.4,-5.6) R3(-1.6,-5.6) R7(1.6,-5.6) R8(2.4,-5.6) R9(3.2,-5.6)
  silkscreen extent -4,-6.5 4,6.5, body extent -4,-6.5 4,6.5, height 1.2
KLMAG2GEND-B031 [mm] "BGA, 153-Leads, Body 11.50x13.00mmx1.00mm, Pitch 0.50mm"
  round 0.25 smd: A1(-3.25,3.25) A2(-2.75,3.25) A3(-2.25,3.25) A4(-1.75,3.25) A5(-1.25,3.25) A6(-0.75,3.25) A7(-0.25,3.25) A8(0.25,3.25) A9(0.75,3.25) A10(1.25,3.25) A11(1.75,3.25) A12(2.25,3.25) A13(2.75,3.25) A14(3.25,3.25) B1(-3.25,2.75) B2(-2.75,2.75) B3(-2.25,2.75) B4(-1.75,2.75) B5(-1.25,2.75) B6(-0.75,2.75) B7(-0.25,2.75) B8(0.25,2.75) B9(0.75,2.75) B10(1.25,2.75) B11(1.75,2.75) B12(2.25,2.75) B13(2.75,2.75) B14(3.25,2.75) C1(-3.25,2.25) C2(-2.75,2.25) C3(-2.25,2.25) C4(-1.75,2.25) C5(-1.25,2.25) C6(-0.75,2.25) C7(-0.25,2.25) C8(0.25,2.25) C9(0.75,2.25) C10(1.25,2.25) C11(1.75,2.25) C12(2.25,2.25) C13(2.75,2.25) C14(3.25,2.25) D1(-3.25,1.75) D2(-2.75,1.75) D3(-2.25,1.75) D4(-1.75,1.75) D12(2.25,1.75) D13(2.75,1.75) D14(3.25,1.75) E1(-3.25,1.25) E2(-2.75,1.25) E3(-2.25,1.25) E5(-1.25,1.25) E6(-0.75,1.25) E7(-0.25,1.25) E8(0.25,1.25) E9(0.75,1.25) E10(1.25,1.25) E12(2.25,1.25) E13(2.75,1.25) E14(3.25,1.25) F1(-3.25,0.75) F2(-2.75,0.75) F3(-2.25,0.75) F5(-1.25,0.75) F10(1.25,0.75) F12(2.25,0.75) F13(2.75,0.75) F14(3.25,0.75) G1(-3.25,0.25) G2(-2.75,0.25) G3(-2.25,0.25) G5(-1.25,0.25) G10(1.25,0.25) G12(2.25,0.25) G13(2.75,0.25) G14(3.25,0.25) H1(-3.25,-0.25) H2(-2.75,-0.25) H3(-2.25,-0.25) H5(-1.25,-0.25) H10(1.25,-0.25) H12(2.25,-0.25) H13(2.75,-0.25) H14(3.25,-0.25) J1(-3.25,-0.75) J2(-2.75,-0.75) J3(-2.25,-0.75) J5(-1.25,-0.75) J10(1.25,-0.75) J12(2.25,-0.75) J13(2.75,-0.75) J14(3.25,-0.75) K1(-3.25,-1.25) K2(-2.75,-1.25) K3(-2.25,-1.25) K5(-1.25,-1.25) K6(-0.75,-1.25) K7(-0.25,-1.25) K8(0.25,-1.25) K9(0.75,-1.25) K10(1.25,-1.25) K12(2.25,-1.25) K13(2.75,-1.25) K14(3.25,-1.25) L1(-3.25,-1.75) L2(-2.75,-1.75) L3(-2.25,-1.75) L12(2.25,-1.75) L13(2.75,-1.75) L14(3.25,-1.75) M1(-3.25,-2.25) M2(-2.75,-2.25) M3(-2.25,-2.25) M4(-1.75,-2.25) M5(-1.25,-2.25) M6(-0.75,-2.25) M7(-0.25,-2.25) M8(0.25,-2.25) M9(0.75,-2.25) M10(1.25,-2.25) M11(1.75,-2.25) M12(2.25,-2.25) M13(2.75,-2.25) M14(3.25,-2.25) N1(-3.25,-2.75) N2(-2.75,-2.75) N3(-2.25,-2.75) N4(-1.75,-2.75) N5(-1.25,-2.75) N6(-0.75,-2.75) N7(-0.25,-2.75) N8(0.25,-2.75) N9(0.75,-2.75) N10(1.25,-2.75) N11(1.75,-2.75) N12(2.25,-2.75) N13(2.75,-2.75) N14(3.25,-2.75) P1(-3.25,-3.25) P2(-2.75,-3.25) P3(-2.25,-3.25) P4(-1.75,-3.25) P5(-1.25,-3.25) P6(-0.75,-3.25) P7(-0.25,-3.25) P8(0.25,-3.25) P9(0.75,-3.25) P10(1.25,-3.25) P11(1.75,-3.25) P12(2.25,-3.25) P13(2.75,-3.25) P14(3.25,-3.25)
  silkscreen extent -5.75,-6.5 5.75,6.5, body extent -5.75,-6.5 5.75,6.5, height 1
L0402 [mm] "Chip Inductor, 2-Leads, Body 1.00x0.50mm, IPC Medium Density"
  rect 0.56x0.62 smd: 1(-0.47,0) 2(0.47,0)
  body extent -0.53,-0.28 0.53,0.28, height 0.55
LCC40PW-M [mm]
  round 6 hole 4.4 unplated: 1(-8.8,-11.079) 2(0,-11.079) 3(8.8,-11.079)
  round 2.5 hole 1.6 unplated: ""(-12.8,-1.329) ""(12.8,-1.329)
  body extent -14.23,-14.45 14.23,14.45, height 13.55
LM74700QDBVR-Q1 [mm] "SOT23, 6-Leads, Body 2.90x2.80mm, Pitch 0.95mm, IPC Medium Density"
  rrect50% 1.1x0.6 smd: 1(-1.3,0.95) 2(-1.3,0) 3(-1.3,-0.95) 4(1.3,-0.95) 5(1.3,0) 6(1.3,0.95)
  silkscreen extent -0.56,0.7 -0.05,1.2, body extent -1.5,-1.53 1.5,1.53, height 1.45
MX25L25645GZ2I-08G [mm] "SON, 8-Leads, Body 6.00x8.00mm, Pitch 1.27mm, Thermal Pad 4.60x4.70mm, IPC Medium Density"
  rrect50% 0.95x0.45 smd: 1(-3.87,1.905) 2(-3.87,0.635) 3(-3.87,-0.635) 4(-3.87,-1.905) 5(3.87,-1.905) 6(3.87,-0.635) 7(3.87,0.635) 8(3.87,1.905)
  rrect5% 4.7x4.6 smd paste-2.35: 9(0,0)
  silkscreen extent -3.19,1.65 -2.69,2.16, body extent -4.1,-3.05 4.1,3.05, height 0.8
NTC0402 [mm] "Chip Resistor, 2-Leads, Body 1.00x0.50mm, IPC Medium Density"
  rect 0.4x0.5 smd: 1(-0.451,0) 2(0.451,0)
  body extent -0.53,-0.28 0.53,0.28, height 0.55
OK252032768KJBA4SL [mm]
  rrect50% 0.9x0.8 smd: 1(-0.925,-0.725) 2(0.925,-0.725) 3(0.925,0.725) 4(-0.925,0.725)
  silkscreen extent -0.27,-0.98 0.23,-0.47, body extent -1.25,-1 1.25,1, height 0.8
OT252025MJBA4SL [mm]
  rrect50% 0.9x0.8 smd: 1(-0.925,-0.725) 2(0.925,-0.725) 3(0.925,0.725) 4(-0.925,0.725)
  silkscreen extent -0.27,-0.98 0.23,-0.47, body extent -1.25,-1 1.25,1, height 0.8
PESD5V0H1BSF [mm] "DFN, 2-Leads, Body 0.30x0.60mm, Pitch 0.40mm, IPC Medium Density"
  rect 0.25x0.35 smd: 1(-0.2,0) 2(0.2,0)
  body extent -0.31,-0.16 0.31,0.16, height 0.32
R0402 [mm] "Chip Resistor, 2-Leads, Body 1.00x0.50mm, IPC Medium Density"
  rect 0.55x0.55 smd: 1(-0.475,0) 2(0.475,0)
  silkscreen extent -0.9,-0.45 0.9,0.45, body extent -0.55,-0.28 0.55,0.28, height 0.4
R0603 [mm] "Chip Resistor, 2-Leads, Body 1.60x0.80mm, IPC Medium Density"
  rect 0.75x0.9 smd: 1(-0.825,0) 2(0.825,0)
  silkscreen extent -1.45,-0.7 1.45,0.7, body extent -0.85,-0.45 0.85,0.45, height 0.55
R0805 [mm] "Chip Resistor, 2-Leads, Body 2.00x1.27mm, IPC Medium Density"
  rect 0.9x1.4 smd: 1(-0.975,0) 2(0.975,0)
  body extent -1.07,-0.7 1.07,0.7, height 0.65
R1206 [mm] "Chip Resistor, 2-Leads, Body 3.10x1.58mm, IPC Medium Density"
  rect 1.15x1.7 smd: 1(-1.4,0) 2(1.4,0)
  body extent -1.63,-0.85 1.63,0.85, height 0.65
R2512 [mm] "Chip Resistor, 2-Leads, Body 6.35x3.20mm, IPC Medium Density"
  rect 1.15x3.4 smd: 1(-3,0) 2(3,0)
  body extent -3.22,-1.7 3.22,1.7, height 0.65
SK2301AAT [mm] "SOT23, 3-Leads, Body 1.60x1.55mm, Pitch 0.50mm, IPC Medium Density"
  rrect50% 0.75x0.45 smd: D(0.825,0) G(-0.825,0.5) S(-0.825,-0.5)
  body extent -0.82,-0.85 0.82,0.85, height 0.9
SMAJ33CA [mm] "Molded Diode, 2-Leads, Body 5.00x2.67mm, IPC Medium Density"
  rect 2.4x1.6 smd: 1(-1.925,0) 2(1.925,0)
  silkscreen extent -0.53,-0.25 -0.02,0.25, body extent -2.82,-1.4 2.82,1.4, height 2.2
SMF15CA [mm] "SODFL, 2-Leads, Body 1.80x3.73mm, IPC Medium Density"
  rect 1.2x1.2 smd: 1(-1.526,0) 2(1.526,0)
  body extent -1.86,-1 1.86,1, height 1.35
SN74AVC4T245RSVR [mm] "QFN, 16-Leads, Body 1.80x2.60mm, Pitch 0.40mm, IPC Medium Density"
  rrect50% 0.7x0.2 smd: 1(-0.75,0.6)
  rrect50% 0.6x0.2 smd: 2(-0.8,0.2) 3(-0.8,-0.2) 4(-0.8,-0.6) 9(0.8,-0.6) 10(0.8,-0.2) 11(0.8,0.2) 12(0.8,0.6)
  rrect50% 0.2x0.6 smd: 5(-0.6,-1.2) 6(-0.2,-1.2) 7(0.2,-1.2) 8(0.6,-1.2) 13(0.6,1.2) 14(0.2,1.2) 15(-0.2,1.2) 16(-0.6,1.2)
  silkscreen extent -1.12,0.91 -0.89,0.91, body extent -0.97,-1.38 0.97,1.38, height 0.55
SN74AXC1T45DEAR [mm] "PSON, 6-Leads, Body 1.00x1.00mm, Pitch 0.35mm, IPC Medium Density"
  rrect50% 0.36x0.16 smd: 1(-0.25,0.35)
  rrect50% 0.31x0.16 smd: 2(-0.275,0) 3(-0.275,-0.35) 4(0.275,-0.35) 5(0.275,0) 6(0.275,0.35)
  silkscreen extent -0.42,0.67 -0.1,0.67, body extent -0.53,-0.53 0.53,0.53, height 0.4
SN74AXC2T245RSWR [mm] "QFN, 10-Leads, Body 1.40x1.80mm, Pitch 0.40mm, IPC Medium Density"
  rrect50% 0.7x0.2 smd: 1(-0.55,0.2)
  rrect50% 0.6x0.2 smd: 2(-0.6,-0.2) 6(0.6,-0.2) 7(0.6,0.2)
  rrect50% 0.2x0.6 smd: 3(-0.4,-0.8) 4(0,-0.8) 5(0.4,-0.8) 8(0.4,0.8) 9(0,0.8) 10(-0.4,0.8)
  silkscreen extent -0.89,0.51 -0.68,0.51, body extent -0.77,-0.97 0.77,0.97, height 0.55
SN74AXC4T774RSVR [mm] "QFN, 16-Leads, Body 1.80x2.60mm, Pitch 0.40mm, IPC Medium Density"
  rrect50% 0.7x0.2 smd: 1(-0.75,0.6)
  rrect50% 0.6x0.2 smd: 2(-0.8,0.2) 3(-0.8,-0.2) 4(-0.8,-0.6) 9(0.8,-0.6) 10(0.8,-0.2) 11(0.8,0.2) 12(0.8,0.6)
  rrect50% 0.2x0.6 smd: 5(-0.6,-1.2) 6(-0.2,-1.2) 7(0.2,-1.2) 8(0.6,-1.2) 13(0.6,1.2) 14(0.2,1.2) 15(-0.2,1.2) 16(-0.6,1.2)
  silkscreen extent -1.1,0.95 -0.9,0.95, body extent -0.97,-1.38 0.97,1.38, height 0.55
SN74LVC1G08DCKR [mm] "SOT23, 5-Leads, Body 2.00x2.10mm, Pitch 0.65mm, IPC Medium Density"
  rrect50% 0.85x0.4 smd: 1(-1.125,0.65) 2(-1.125,0) 3(-1.125,-0.65) 4(1.125,-0.65) 5(1.125,0.65)
  silkscreen extent -0.5,0.4 0.01,0.9, body extent -1.2,-1.07 1.2,1.07, height 1.1
SN74LVC1G14DRYR [mm] "PSON, 6-Leads, Body 1.45x1.00mm, Pitch 0.50mm, IPC Medium Density"
  rrect50% 0.35x0.2 smd: 1(-0.275,0.5)
  rrect50% 0.3x0.2 smd: 2(-0.3,0) 3(-0.3,-0.5) 4(0.3,-0.5) 5(0.3,0) 6(0.3,0.5)
  silkscreen extent -0.45,0.86 -0.12,0.86, body extent -0.53,-0.75 0.53,0.75, height 0.6
STM32H750XBH6 [mm] "BGA, 265-Leads, Body 14.00x14.00mmx1.20mm, Pitch 0.80mm"
  round 0.3 smd: A1(-6.4,6.4) A2(-5.6,6.4) A3(-4.8,6.4) A4(-4,6.4) A5(-3.2,6.4) A6(-2.4,6.4) A7(-1.6,6.4) A8(-0.8,6.4) A9(0,6.4) A10(0.8,6.4) A11(1.6,6.4) A12(2.4,6.4) A13(3.2,6.4) A14(4,6.4) A15(4.8,6.4) A16(5.6,6.4) A17(6.4,6.4) B1(-6.4,5.6) B2(-5.6,5.6) B3(-4.8,5.6) B4(-4,5.6) B5(-3.2,5.6) B6(-2.4,5.6) B7(-1.6,5.6) B8(-0.8,5.6) B9(0,5.6) B10(0.8,5.6) B11(1.6,5.6) B12(2.4,5.6) B13(3.2,5.6) B14(4,5.6) B15(4.8,5.6) B16(5.6,5.6) B17(6.4,5.6) C1(-6.4,4.8) C2(-5.6,4.8) C3(-4.8,4.8) C4(-4,4.8) C5(-3.2,4.8) C6(-2.4,4.8) C7(-1.6,4.8) C8(-0.8,4.8) C9(0,4.8) C10(0.8,4.8) C11(1.6,4.8) C12(2.4,4.8) C13(3.2,4.8) C14(4,4.8) C15(4.8,4.8) C16(5.6,4.8) C17(6.4,4.8) D1(-6.4,4) D2(-5.6,4) D3(-4.8,4) D4(-4,4) D5(-3.2,4) D6(-2.4,4) D7(-1.6,4) D8(-0.8,4) D9(0,4) D10(0.8,4) D11(1.6,4) D12(2.4,4) D13(3.2,4) D14(4,4) D15(4.8,4) D16(5.6,4) D17(6.4,4) E1(-6.4,3.2) E2(-5.6,3.2) E3(-4.8,3.2) E4(-4,3.2) E5(-3.2,3.2) E6(-2.4,3.2) E7(-1.6,3.2) E8(-0.8,3.2) E9(0,3.2) E10(0.8,3.2) E11(1.6,3.2) E12(2.4,3.2) E13(3.2,3.2) E14(4,3.2) E15(4.8,3.2) E16(5.6,3.2) E17(6.4,3.2) F1(-6.4,2.4) F2(-5.6,2.4) F3(-4.8,2.4) F4(-4,2.4) F5(-3.2,2.4) F13(3.2,2.4) F14(4,2.4) F15(4.8,2.4) F16(5.6,2.4) F17(6.4,2.4) G1(-6.4,1.6) G2(-5.6,1.6) G3(-4.8,1.6) G4(-4,1.6) G5(-3.2,1.6) G7(-1.6,1.6) G8(-0.8,1.6) G9(0,1.6) G10(0.8,1.6) G11(1.6,1.6) G13(3.2,1.6) G14(4,1.6) G15(4.8,1.6) G16(5.6,1.6) G17(6.4,1.6) H1(-6.4,0.8) H2(-5.6,0.8) H3(-4.8,0.8) H4(-4,0.8) H5(-3.2,0.8) H7(-1.6,0.8) H8(-0.8,0.8) H9(0,0.8) H10(0.8,0.8) H11(1.6,0.8) H13(3.2,0.8) H14(4,0.8) H15(4.8,0.8) H16(5.6,0.8) H17(6.4,0.8) J1(-6.4,0) J2(-5.6,0) J3(-4.8,0) J4(-4,0) J5(-3.2,0) J7(-1.6,0) J8(-0.8,0) J9(0,0) J10(0.8,0) J11(1.6,0) J13(3.2,0) J14(4,0) J15(4.8,0) J16(5.6,0) J17(6.4,0) K1(-6.4,-0.8) K2(-5.6,-0.8) K3(-4.8,-0.8) K4(-4,-0.8) K5(-3.2,-0.8) K7(-1.6,-0.8) K8(-0.8,-0.8) K9(0,-0.8) K10(0.8,-0.8) K11(1.6,-0.8) K13(3.2,-0.8) K14(4,-0.8) K15(4.8,-0.8) K16(5.6,-0.8) K17(6.4,-0.8) L1(-6.4,-1.6) L2(-5.6,-1.6) L3(-4.8,-1.6) L4(-4,-1.6) L5(-3.2,-1.6) L7(-1.6,-1.6) L8(-0.8,-1.6) L9(0,-1.6) L10(0.8,-1.6) L11(1.6,-1.6) L13(3.2,-1.6) L14(4,-1.6) L15(4.8,-1.6) L16(5.6,-1.6) L17(6.4,-1.6) M1(-6.4,-2.4) M2(-5.6,-2.4) M3(-4.8,-2.4) M4(-4,-2.4) M5(-3.2,-2.4) M13(3.2,-2.4) M14(4,-2.4) M15(4.8,-2.4) M16(5.6,-2.4) M17(6.4,-2.4) N1(-6.4,-3.2) N2(-5.6,-3.2) N3(-4.8,-3.2) N4(-4,-3.2) N5(-3.2,-3.2) N6(-2.4,-3.2) N7(-1.6,-3.2) N8(-0.8,-3.2) N9(0,-3.2) N10(0.8,-3.2) N11(1.6,-3.2) N12(2.4,-3.2) N13(3.2,-3.2) N14(4,-3.2) N15(4.8,-3.2) N16(5.6,-3.2) N17(6.4,-3.2) P1(-6.4,-4) P2(-5.6,-4) P3(-4.8,-4) P4(-4,-4) P5(-3.2,-4) P6(-2.4,-4) P7(-1.6,-4) P8(-0.8,-4) P9(0,-4) P10(0.8,-4) P11(1.6,-4) P12(2.4,-4) P13(3.2,-4) P14(4,-4) P15(4.8,-4) P16(5.6,-4) P17(6.4,-4) R1(-6.4,-4.8) R2(-5.6,-4.8) R3(-4.8,-4.8) R4(-4,-4.8) R5(-3.2,-4.8) R6(-2.4,-4.8) R7(-1.6,-4.8) R8(-0.8,-4.8) R9(0,-4.8) R10(0.8,-4.8) R11(1.6,-4.8) R12(2.4,-4.8) R13(3.2,-4.8) R14(4,-4.8) R15(4.8,-4.8) R16(5.6,-4.8) R17(6.4,-4.8) T1(-6.4,-5.6) T2(-5.6,-5.6) T3(-4.8,-5.6) T4(-4,-5.6) T5(-3.2,-5.6) T6(-2.4,-5.6) T7(-1.6,-5.6) T8(-0.8,-5.6) T9(0,-5.6) T10(0.8,-5.6) T11(1.6,-5.6) T12(2.4,-5.6) T13(3.2,-5.6) T14(4,-5.6) T15(4.8,-5.6) T16(5.6,-5.6) T17(6.4,-5.6) U1(-6.4,-6.4) U2(-5.6,-6.4) U3(-4.8,-6.4) U4(-4,-6.4) U5(-3.2,-6.4) U6(-2.4,-6.4) U7(-1.6,-6.4) U8(-0.8,-6.4) U9(0,-6.4) U10(0.8,-6.4) U11(1.6,-6.4) U12(2.4,-6.4) U13(3.2,-6.4) U14(4,-6.4) U15(4.8,-6.4) U16(5.6,-6.4) U17(6.4,-6.4)
  silkscreen extent -7,-7 7,7, body extent -7,-7 7,7, height 1.2
TLV9061IDBVR [mm] "SOT23, 5-Leads, Body 2.90x2.80mm, Pitch 0.95mm, IPC Medium Density"
  rrect50% 1.1x0.6 smd: 1(-1.3,0.95) 2(-1.3,0) 3(-1.3,-0.95) 4(1.3,-0.95) 5(1.3,0.95)
  silkscreen extent -0.55,0.7 -0.04,1.2, body extent -1.5,-1.53 1.5,1.53, height 1.45
TPESD8004MUTAG [mm]
  rrect45% 0.675x0.2 smd: 1(-0.437,1) 2(-0.437,0.5) 4(-0.437,-0.5) 5(-0.437,-1) 6(0.437,-1) 7(0.437,-0.5) 9(0.437,0.5) 10(0.437,1)
  rrect45% 0.675x0.4 smd paste-0.041: 3(-0.437,0) 8(0.437,0)
  silkscreen extent -0.69,1.32 -0.18,1.32, body extent -0.5,-1.25 0.5,1.25, height 0.5
TPS62130RGTR [mm] "PQFN, 16-Leads, Body 3.00x3.00mm, Pitch 0.50mm, Thermal Pad 1.68x1.68mm, IPC Medium Density"
  oval 0.6x0.24 smd: 1(-1.4,0.75) 2(-1.4,0.25) 3(-1.4,-0.25) 4(-1.4,-0.75) 9(1.4,-0.75) 10(1.4,-0.25) 11(1.4,0.25) 12(1.4,0.75)
  oval 0.24x0.6 smd: 5(-0.75,-1.4) 6(-0.25,-1.4) 7(0.25,-1.4) 8(0.75,-1.4) 13(0.75,1.4) 14(0.25,1.4) 15(-0.25,1.4) 16(-0.75,1.4)
  rect 1.68x1.68 smd paste-2539.97: 17(0,0)
  silkscreen extent -1.55,-1.55 1.55,1.55, body extent -1.55,-1.55 1.55,1.55, height 1
TXB0101DCKR [mm] "SOT23, 6-Leads, Body 2.00x2.10mm, Pitch 0.65mm, IPC Medium Density"
  rrect25% 0.9x0.4 smd: 1(-1.1,0.65) 2(-1.1,0) 3(-1.1,-0.65) 4(1.1,-0.65) 5(1.1,0) 6(1.1,0.65)
  silkscreen extent -0.45,0.4 0.06,0.9, body extent -1.2,-1.07 1.2,1.08, height 1.1
TXS0102DQER [mm] "SON, 8-Leads, Body 1.40x1.00mm, Pitch 0.35mm, IPC Medium Density"
  rrect50% 0.6x0.175 smd: 1(-0.4,0.525)
  rrect50% 0.5x0.175 smd: 2(-0.45,0.175) 3(-0.45,-0.175) 4(-0.45,-0.525) 5(0.45,-0.525) 6(0.45,-0.175) 7(0.45,0.175) 8(0.45,0.525)
  silkscreen extent -0.63,0.83 -0.21,0.83, body extent -0.58,-0.72 0.58,0.72, height 0.4
TXV0106BQBR [mm] "QFN, 16-Leads, Body 2.50x3.50mm, Pitch 0.50mm, Thermal Pad 1.00x2.00mm, IPC Medium Density"
  rrect50% 0.24x0.6 smd: 1(-0.25,1.65) 8(-0.25,-1.65) 9(0.25,-1.65) 16(0.25,1.65)
  rrect50% 0.6x0.24 smd: 2(-1.15,1.25) 3(-1.15,0.75) 4(-1.15,0.25) 5(-1.15,-0.25) 6(-1.15,-0.75) 7(-1.15,-1.25) 10(1.15,-1.25) 11(1.15,-0.75) 12(1.15,-0.25) 13(1.15,0.25) 14(1.15,0.75) 15(1.15,1.25)
  rrect10% 1x2 smd: 17(0,0)
  silkscreen extent -1.3,-1.8 1.3,1.96, body extent -1.35,-1.85 1.35,1.85, height 0.8
XT60PW-M [mm]
  round 4.25 hole 2.9: 1(-3.6,-3) 2(3.6,-3)
  oval 1.75x3 hole 1 slot 2 at 90 deg: 3(-6.75,3) 4(6.75,3)
  body extent -7.95,-4.85 7.95,13.35, height 8.45